# Allegro board pcb.brd
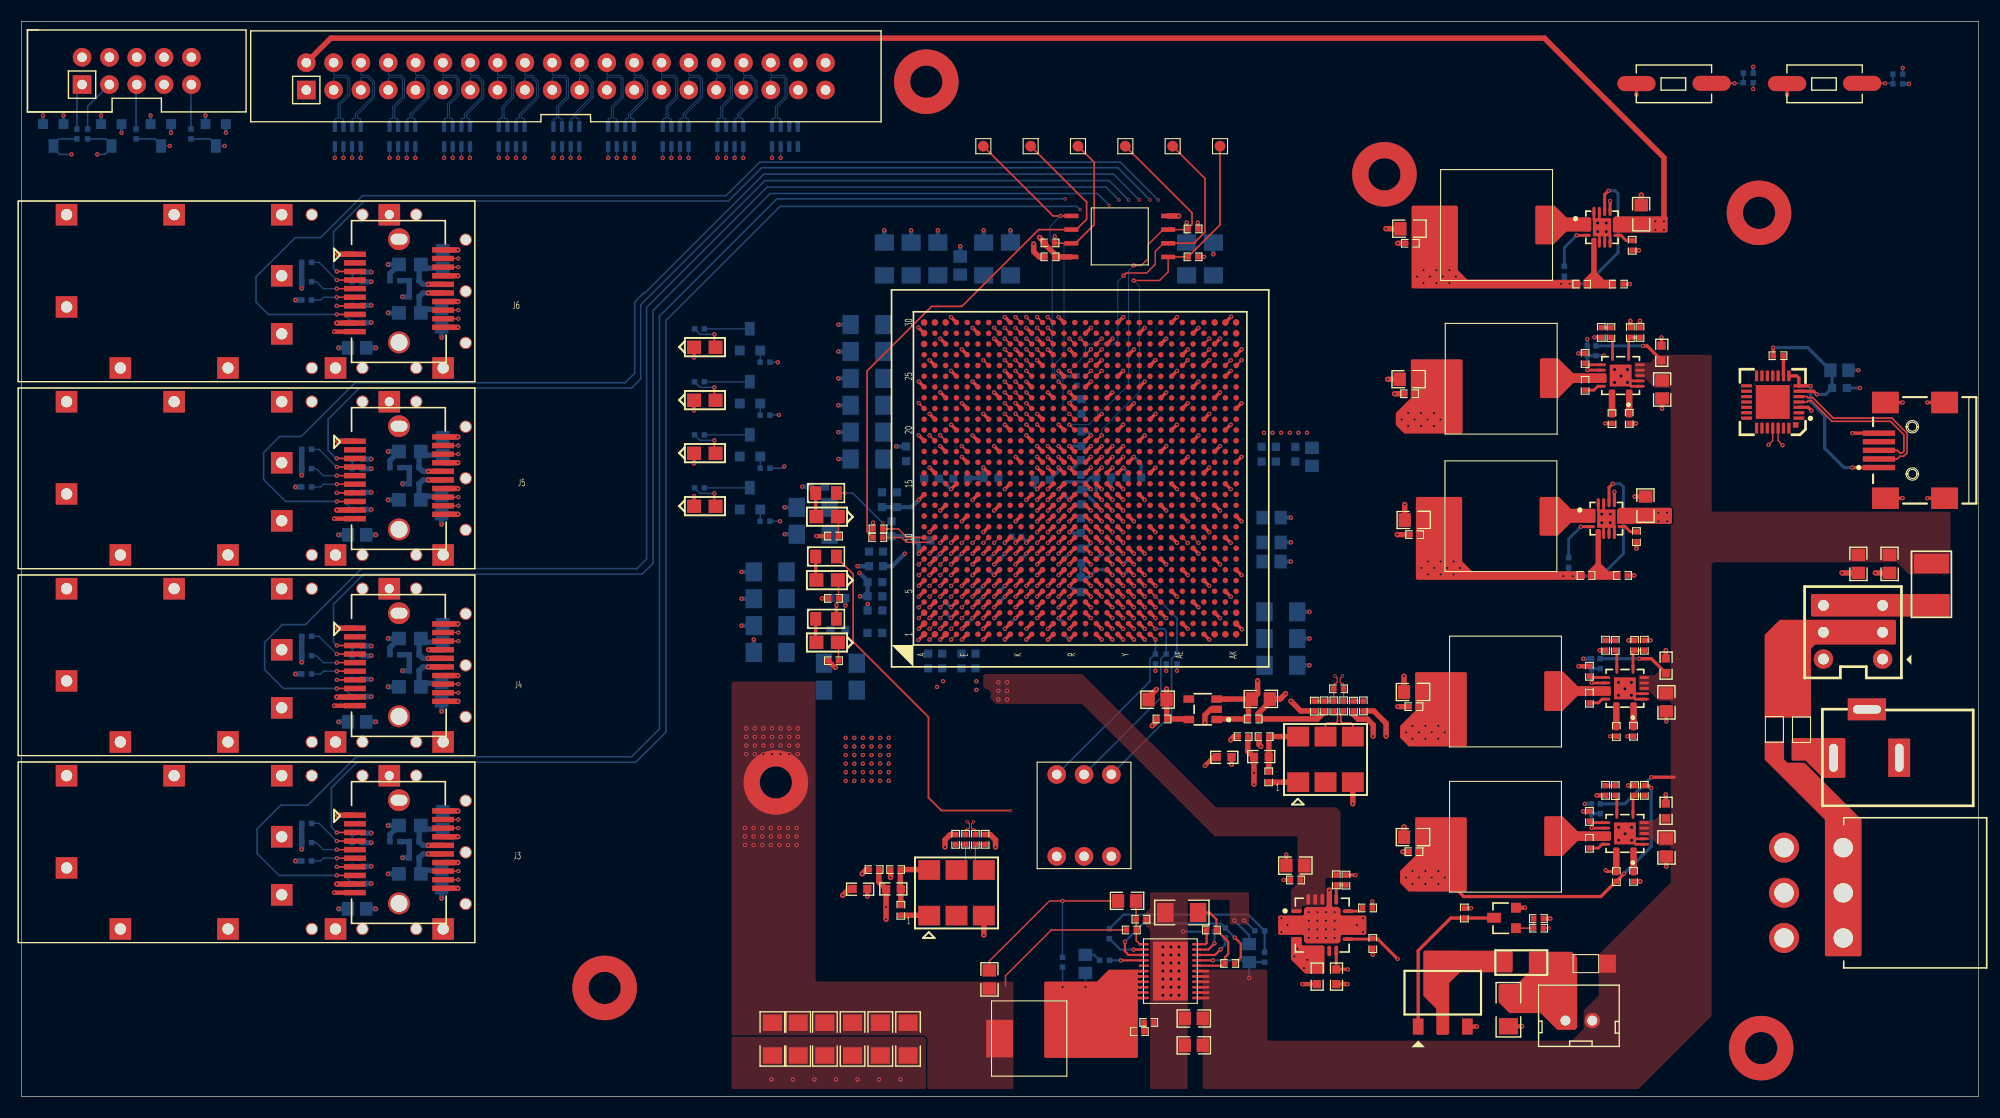
[diagram p0: board, top side]
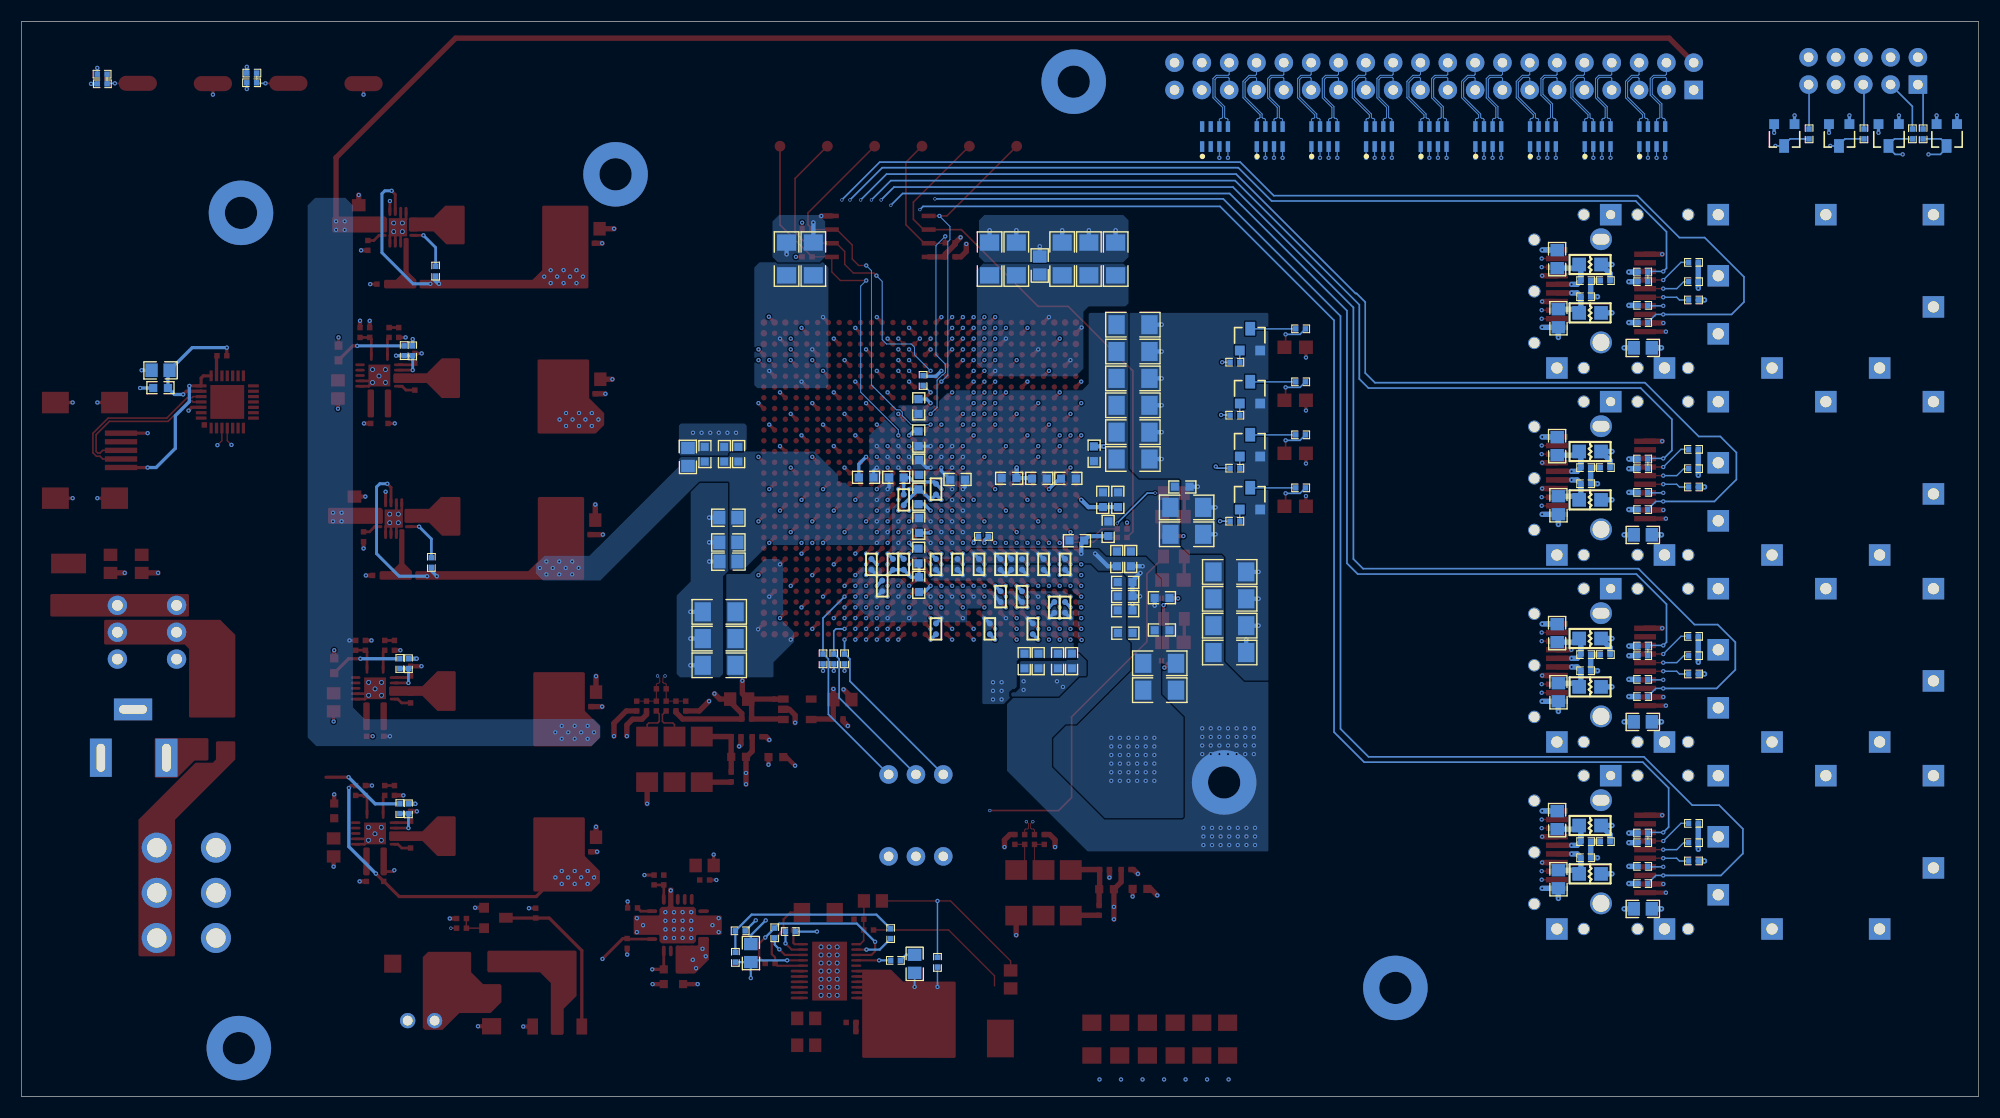
[diagram p1: board, bottom side, seen from below]

Outline 181.9 x 100 mm; copper layers: TOP, GND1, SIG2, 3V3, GND2, BOTTOM. Coordinates in mm from the lower left corner of the outline.
Outline path: 0,100 181.9,100 181.9,0 0,0 0,100

## Design rules (mm)
constraint set DEFAULT: min track width 0.089, pair gap 0.2
net group DP_GPIO1: nets GPIO1_N GPIO1_P
net group DP_GPIO2: nets GPIO2_N GPIO2_P
net group DP_GPIO3: nets GPIO3_N GPIO3_P
net group DP_GPIO4: nets GPIO4_N GPIO4_P
net group DP_GPIO5: nets GPIO5_N GPIO5_P
net group DP_GPIO6: nets GPIO6_N GPIO6_P
net group DP_GPIO7: nets GPIO7_N GPIO7_P
net group DP_GPIO8: nets GPIO8_N GPIO8_P
net group DP_GPIO9: nets GPIO9_N GPIO9_P
net group DP_GPIO10: nets GPIO10_N GPIO10_P
net group DP_GPIO11: nets GPIO11_N GPIO11_P
net group DP_GPIO12: nets GPIO12_N GPIO12_P
net group DP_GPIO13: nets GPIO13_N GPIO13_P
net group DP_GPIO14: nets GPIO14_N GPIO14_P
net group DP_GPIO15: nets GPIO15_N GPIO15_P
net group DP_GPIO16: nets GPIO16_N GPIO16_P
net group DP_GPIO17: nets GPIO17_N GPIO17_P
net group DP_GPIO_H_1: nets GPIO_H_1N GPIO_H_1P
net group DP_GPIO_H_2: nets GPIO_H_2N GPIO_H_2P
net group DP_GPIO_H_3: nets GPIO_H_3N GPIO_H_3P
net group DP_GPIO_H_4: nets GPIO_H_4N GPIO_H_4P
net group DP_GPIO_H_5: nets GPIO_H_5N GPIO_H_5P
net group DP_GPIO_H_6: nets GPIO_H_6N GPIO_H_6P
net group DP_GPIO_H_7: nets GPIO_H_7N GPIO_H_7P
net group DP_GPIO_H_8: nets GPIO_H_8N GPIO_H_8P
net group DP_GPIO_H_9: nets GPIO_H_9N GPIO_H_9P
net group DP_GPIO_H_10: nets GPIO_H_10N GPIO_H_10P
net group DP_GPIO_H_11: nets GPIO_H_11N GPIO_H_11P
net group DP_GPIO_H_12: nets GPIO_H_12N GPIO_H_12P
net group DP_GPIO_H_13: nets GPIO_H_13N GPIO_H_13P
net group DP_GPIO_H_14: nets GPIO_H_14N GPIO_H_14P
net group DP_GPIO_H_15: nets GPIO_H_15N GPIO_H_15P
net group DP_GPIO_H_16: nets GPIO_H_16N GPIO_H_16P
net group DP_GPIO_H_17: nets GPIO_H_17N GPIO_H_17P
net group DP_GTX_CLK_SRC: nets GTX_CLK_N0 GTX_CLK_P0
net group DP_GTXCLK0_115: nets GTXCLK_N_115 GTXCLK_P_115
net group DP_SYS_CLK: nets CLK_N CLK_P
net group DP_SYS_CLK_2_CAP: nets N492322 N492394
net group DP_USB2UART_IN: nets N720129 N720133
net group MG_SFP1_RX: nets SFP1_RX_N SFP1_RX_P
net group MG_SFP1_TX: nets SFP1_TX_N SFP1_TX_P
net group MG_SFP2_RX: nets SFP2_RX_N SFP2_RX_P
net group MG_SFP2_TX: nets SFP2_TX_N SFP2_TX_P
net group MG_SFP3_RX: nets SFP3_RX_N SFP3_RX_P
net group MG_SFP3_TX: nets SFP3_TX_N SFP3_TX_P
net group MG_SFP4_RX: nets SFP4_RX_N SFP4_RX_P
net group MG_SFP4_TX: nets SFP4_TX_N SFP4_TX_P

## Placement (name value [footprint] x y rotation side)
C1  10uF  [C0805]  170.73 49.55 270 top
C2  100nF  [C0805]  173.63 49.55 270 top
C3  100uF  [C1206]  138.21 8.06 270 top
C4  4.7uF_12V  [C0805]  114.11 13.34 270 bottom
C5  100nF  [C0805]  98.89 12.34 270 bottom
C6  1nF  [C0402]  103.89 6.04 180 top
C7  6.8nF  [C0805]  89.96 10.89 270 top
C8  1nF  [C0805]  102.76 18.19 0 top
C9  15uF_12V  [C0805]  108.96 4.77 180 top
C10  15uF_12V  [C0805]  108.96 7.27 180 top
C11  100uF  [C1206]  72.19 5.34 270 top
C12  100uF  [C1206]  79.82 5.34 270 top
C13  100uF  [C1206]  69.79 5.34 270 top
C14  22uF  [C0805]  129.41 53.62 0 top
C15  100nF  [C0402]  129.51 52.27 0 top
C16  100uF  [C1206]  74.67 5.34 270 top
C17  100uF  [C1206]  77.25 5.34 270 top
C18  100uF  [C1206]  82.41 5.34 270 top
C19  10uF  [C0805]  150.96 54.97 90 top
C20  3.3nF  [C0402]  150.11 52.07 270 top
C21  330nF  [C1206]  107.84 17.12 180 top
C22  100nF  [C0402]  145.74 37.07 90 top
C23  100nF  [C0402]  145.34 66.17 90 top
C24  10uF_12V  [C0805]  152.89 36.67 270 top
C25  4.7uF_12V  [C0603]  152.84 40.07 90 top
C26  47uF  [C0805]  129.34 37.62 0 top
C27  100nF  [C0402]  129.44 36.27 0 top
C28  10uF_12V  [C0805]  152.49 65.77 270 top
C29  4.7uF_12V  [C0603]  152.44 69.17 90 top
C30  47uF  [C0805]  128.94 66.72 0 top
C31  100nF  [C0402]  129.04 65.37 0 top
C32  10nF  [C0402]  145.74 39.57 90 top
C33  8.2nF  [C0402]  147.24 41.97 270 top
C34  8.2nF  [C0402]  146.84 71.07 270 top
C35  10nF  [C0402]  145.34 68.67 90 top
C36  100nF  [C0402]  145.74 23.57 90 top
C37  22uF  [C0805]  129.01 80.72 0 top
C38  100nF  [C0402]  129.11 79.37 0 top
C39  10uF_12V  [C0805]  152.89 23.17 270 top
C40  4.7uF_12V  [C0603]  152.84 26.57 90 top
C41  47uF  [C0805]  129.34 24.12 0 top
C42  100nF  [C0402]  129.44 22.77 0 top
C43  10uF  [C0805]  150.56 82.07 90 top
C44  3.3nF  [C0402]  149.71 79.17 270 top
C45  10nF  [C0402]  145.74 26.07 90 top
C46  8.2nF  [C0402]  147.24 28.47 270 top
C49  10uF  [C0805]  115.2 36.97 0 top
C50  100nF  [C0402]  114.5 35.12 0 top
C51  10uF  [C0805]  105.6 36.92 180 top
C52  100nF  [C0402]  106 35.12 180 top
C60  2.2uF  [C0603]  120.4 11.14 90 top
C61  100nF  [C0402]  118.4 20.14 180 top
C62  22uF  [C0805]  118.4 21.49 180 top
C63  2.2uF  [C0603]  122.2 11.14 90 top
C64  1nF  [C0402]  125.1 17.54 180 top
C69  100uF  [C1206]  80.2 77.91 90 bottom
C70  100uF  [C1206]  85.17 77.91 90 bottom
C71  100uF  [C1206]  117.06 45.08 0 bottom
C72  100uF  [C1206]  117.06 42.6 0 bottom
C73  100uF  [C1206]  110.79 77.91 90 bottom
C74  100uF  [C1206]  117.06 40.11 0 bottom
C75  100uF  [C1206]  108.3 77.91 90 bottom
C76  100uF  [C1206]  82.69 77.91 90 bottom
C77  100uF  [C1206]  76.11 37.8 0 bottom
C78  100uF  [C1206]  73.59 54.8 180 bottom
C79  100uF  [C1206]  69.59 43.8 180 bottom
C80  4.7uF  [C0603]  103.39 57.57 0 bottom
C81  4.7uF  [C0603]  94.89 57.37 0 bottom
C82  4.7uF  [C0603]  98.47 53.11 270 bottom
C83  4.7uF  [C0603]  80.07 50.01 270 bottom
C84  4.7uF  [C0603]  78.77 50.01 270 bottom
C85  4.7uF  [C0603]  74.01 56.73 180 bottom
C86  4.7uF  [C0603]  75.89 46.37 0 bottom
C87  4.7uF  [C0603]  87.29 57.47 0 bottom
C88  4.7uF  [C0603]  90.11 57.53 180 bottom
C89  4.7uF  [C0603]  98.53 50.29 90 bottom
C90  1uF  [C0603]  98.47 47.61 270 bottom
C91  470nF  [CC0402]  99.9 49.5 90 bottom
C92  22nF  [CC0402]  100.9 49.5 90 bottom
C93  100uF  [C1206]  78.59 59.3 180 bottom
C94  100uF  [C1206]  78.59 61.8 180 bottom
C95  100uF  [C1206]  78.59 64.3 180 bottom
C96  100uF  [C1206]  78.59 66.8 180 bottom
C97  100uF  [C1206]  69.59 46.3 180 bottom
C98  100uF  [C1206]  69.59 48.8 180 bottom
C99  100uF  [C1206]  73.59 52.3 180 bottom
C100  100uF  [C1206]  78.59 71.8 180 bottom
C101  100uF  [C1206]  78.59 69.3 180 bottom
C102  100uF  [C1206]  76.11 40.3 0 bottom
C103  100uF  [C1206]  69.59 41.3 180 bottom
C104  4.7uF  [C0603]  75.89 43.37 0 bottom
C105  4.7uF  [C0603]  84.59 57.47 0 bottom
C106  4.7uF  [C0603]  82.23 59.79 90 bottom
C107  4.7uF  [C0603]  81.37 55.51 270 bottom
C108  4.7uF  [C0603]  79.97 55.51 270 bottom
C109  4.7uF  [C0603]  80.87 52.81 270 bottom
C110  4.7uF  [C0603]  83.81 51.73 180 bottom
C111  4.7uF  [C0603]  98.53 64.19 90 bottom
C112  4.7uF  [C0603]  98.53 61.19 90 bottom
C113  4.7uF  [C0603]  98.47 58.51 270 bottom
C114  4.7uF  [C0603]  79.31 43.13 180 bottom
C115  4.7uF  [C0603]  79.33 45.21 180 bottom
C116  1uF  [C0603]  79.33 46.53 180 bottom
C117  1uF  [C0603]  79.33 47.85 180 bottom
C118  470nF  [CC0402]  86.9 49.5 90 bottom
C119  470nF  [CC0402]  89.9 49.5 90 bottom
C120  470nF  [CC0402]  90.9 49.5 90 bottom
C121  470nF  [CC0402]  96.9 49.5 90 bottom
C122  22nF  [CC0402]  84.9 49.5 90 bottom
C123  22nF  [CC0402]  88.9 49.5 90 bottom
C124  22nF  [CC0402]  92.9 49.5 90 bottom
C125  22nF  [CC0402]  94.9 49.5 90 bottom
C126  4.7uF  [C0603]  88.67 40.51 270 bottom
C127  4.7uF  [C0603]  87.37 40.51 270 bottom
C128  1uF  [C0603]  84.27 40.51 270 bottom
C129  1uF  [C0603]  85.57 40.51 270 bottom
C130  470nF  [CC0402]  87.9 43.5 270 bottom
C131  470nF  [CC0402]  88.9 46.5 90 bottom
C132  470nF  [CC0402]  90.9 46.5 90 bottom
C133  470nF  [CC0402]  101.9 47.5 90 bottom
C134  22nF  [CC0402]  84.9 45.5 90 bottom
C135  22nF  [CC0402]  85.9 45.5 90 bottom
C136  22nF  [CC0402]  91.9 43.5 270 bottom
C137  22nF  [CC0402]  96.9 43.5 270 bottom
C138  47uF  [C0805]  116.2 51.55 0 bottom
C139  47uF  [C0805]  116.2 53.85 0 bottom
C140  47uF  [C0805]  116.19 49.77 0 bottom
C141  4.7uF  [C0603]  115.27 59.75 90 bottom
C142  47uF  [C0805]  119.95 59.5 90 bottom
C143  4.7uF  [C0603]  116.59 59.75 90 bottom
C144  100nF  [CC0402]  96.9 56.5 270 bottom
C145  470nF  [CC0402]  99.9 55.5 270 bottom
C146  100nF  [C0402]  95.58 78.11 180 top
C147  47uF  [C0805]  87.25 77.3 90 bottom
C148  100uF  [C1206]  89.43 77.91 90 bottom
C149  100nF  [C0402]  115.48 33.47 180 top
C150  100nF  [C0402]  113.53 33.47 180 top
C151  4.7uF  [C0603]  111.78 31.57 0 top
C152  100nF  [C0402]  121.98 36.32 270 top
C153  100nF  [C0402]  122.89 36.32 270 top
C154  100uF  [C1206]  91.92 77.91 90 bottom
C155  1uF  [C0603]  168.98 65.91 0 bottom
C156  10uF  [C0805]  168.98 67.56 0 bottom
C157  22uF  [C0805]  31.2 17.46 0 bottom
C158  100nF  [C0402]  34.7 23.71 0 bottom
C159  10uF  [C0805]  39.05 20.21 270 bottom
C160  100nF  [C0402]  36.5 22.21 180 bottom
C161  10uF  [C0805]  39.15 25.71 90 bottom
C162  100nF  [C0402]  36.5 23.71 180 bottom
C163  100nF  [C0402]  81.23 21.11 180 top
C164  100nF  [C0402]  79.23 21.11 180 top
C165  4.7uF  [C0603]  77.93 19.31 0 top
C166  22uF  [C0805]  31.2 34.85 0 bottom
C167  100nF  [C0402]  34.7 41.1 0 bottom
C168  10uF  [C0805]  39.05 37.6 270 bottom
C169  100nF  [C0402]  36.5 39.6 180 bottom
C170  10uF  [C0805]  39.15 43.1 90 bottom
C171  100nF  [C0402]  36.5 41.1 180 bottom
C172  100nF  [C0402]  87.74 23.91 270 top
C173  100nF  [C0402]  88.66 23.91 270 top
C174  4.7uF  [C0603]  118.4 59.75 90 bottom
C175  22uF  [C0805]  31.2 52.25 0 bottom
C176  100nF  [C0402]  34.7 58.5 0 bottom
C177  10uF  [C0805]  39.05 55 270 bottom
C178  100nF  [C0402]  36.5 57 180 bottom
C179  10uF  [C0805]  39.15 60.5 90 bottom
C180  100nF  [C0402]  36.5 58.5 180 bottom
C181  22uF  [C0805]  31.2 69.64 0 bottom
C182  100nF  [C0402]  34.7 75.9 0 bottom
C183  10uF  [C0805]  39.05 72.4 270 bottom
C184  100nF  [C0402]  36.5 74.4 180 bottom
C185  10uF  [C0805]  39.15 77.9 90 bottom
C186  100nF  [C0402]  36.5 75.9 180 bottom
CCLK  TESTPOINT  [TESTPOINT_M1]  93.8 88.4 0 top
CS  TESTPOINT  [TESTPOINT_M1]  111.4 88.4 0 top
D0  TESTPOINT  [TESTPOINT_M1]  89.4 88.4 0 top
D1  TESTPOINT  [TESTPOINT_M1]  107 88.4 0 top
D2  TESTPOINT  [TESTPOINT_M1]  102.6 88.4 0 top
D3  TESTPOINT  [TESTPOINT_M1]  98.2 88.4 0 top
D4  BAT54S  [SOT-23]  2 90.45 0 bottom
D5  BAT54S  [SOT-23]  12 90.45 0 bottom
D6  BAT54S  [SOT-23]  7.4 90.45 0 bottom
D7  BAT54S  [SOT-23]  17.1 90.45 0 bottom
D8  LED  [LED_0805]  74.88 53.95 90 top
D9  LED  [LED_0805]  74.88 48.05 90 top
D10  LED  [LED_0805]  74.88 42.25 90 top
D11  LED  [LED_0805]  63.51 69.7 270 top
D12  LED  [LED_0805]  63.51 54.9 270 top
D13  LED  [LED_0805]  63.51 59.83 270 top
D14  LED  [LED_0805]  63.51 64.77 270 top
F1  -  [FUSE_1812]  177.53 47.65 90 top
G1  OSC_7050  [OSC6-5X7]  118.67 29.24 0 top
G2  OSC_7050  [OSC6-5X7]  84.37 16.83 0 top
J1  HEADER 20x2/M  [IDC-40J]  50.6 94.9 0 top
J2  USB_B_3  [MINIUSBB]  172.65 60.11 180 top
J3  SFP & CONN  [SFP_SHIELD]  30.99 26.16 0 top
J4  SFP & CONN  [SFP_SHIELD]  30.99 43.56 0 top
J5  SFP & CONN  [SFP_SHIELD]  30.99 60.95 0 top
J6  SFP & CONN  [SFP_SHIELD]  30.99 78.35 0 top
J8  B340A  [B340]  165.45 34.12 90 top
J9  B340A  [B340]  162.93 34.15 90 top
J11  B340A  [B340]  145.41 12.36 0 top
L1  PA0512_101NLT_105nH_250uOhm  [PA0512]  93.66 5.39 180 top
L2  2.2uH 5A  [WRH105R]  137.51 53.97 180 top
L3  2.2uH 5A  [WRH105R]  137.94 37.67 180 top
L4  2.2uH 5A  [WRH105R]  137.54 66.77 180 top
L5  2.2uH 5A  [WRH105R]  137.11 81.07 180 top
L6  2.2uH 5A  [WRH105R]  137.94 24.17 180 top
L7  120Ohm@100Mhz  [L0603]  100.59 57.57 0 bottom
L8  120Ohm@100Mhz  [L0603]  98.53 55.79 90 bottom
L9  120R@100Mhz  [L0603]  115.25 31.6 180 top
L10  220Ohm@100Mhz  [L0805]  36.1 25.21 0 bottom
L11  220Ohm@100Mhz  [L0805]  36.1 20.71 0 bottom
L12  120R@100Mhz  [L0603]  81.05 19.29 180 top
L13  220Ohm@100Mhz  [L0805]  36.1 42.6 0 bottom
L14  220Ohm@100Mhz  [L0805]  36.1 38.1 0 bottom
L15  220Ohm@100Mhz  [L0805]  36.1 60 0 bottom
L16  220Ohm@100Mhz  [L0805]  36.1 55.5 0 bottom
L17  220Ohm@100Mhz  [L0805]  36.1 77.4 0 bottom
L18  220Ohm@100Mhz  [L0805]  36.1 72.9 0 bottom
Q1  NDT3055L  [SOT-223]  132.11 9.66 0 top
Q2  MMBT3904L  [SOT-23]  138.91 15.66 90 top
Q3  MMBT3904L  [SOT-23]  68.66 69.39 180 bottom
Q4  MMBT3904L  [SOT-23]  68.66 54.6 180 bottom
Q5  MMBT3904L  [SOT-23]  68.66 59.53 180 bottom
Q6  MMBT3904L  [SOT-23]  68.66 64.46 180 bottom
R1  10R  [R1206]  139.41 12.46 0 top
R2  1K  [R0402]  134.11 17.06 270 top
R3  1K  [R0402]  141.01 15.66 180 top
R4  10K  [R0402]  141.01 16.56 0 top
R5  2R  [R0402]  100.66 12.67 180 bottom
R6  3.01R  [R0402]  104.79 6.89 0 top
R7  205K  [R0402]  115.55 12.96 90 bottom
R8  6.65K  [R0402]  103.16 15.49 0 top
R9  68.1K  [R0402]  96.76 12.49 90 bottom
R10  105K  [R0402]  112.31 12.38 0 top
R11  39.2K  [R0402]  111.89 15.22 270 bottom
R12  1K  [R0402]  101.11 15.14 270 bottom
R13  10K  [R0402]  143.81 49.67 270 bottom
R14  124K  [R0402]  110.61 15.49 0 top
R15  18.7K 1%  [R0402]  145.41 48.47 180 top
R16  105K  [R0402]  115.09 15.41 180 bottom
R17  187K  [R0402]  110.44 15.34 180 bottom
R18  10K  [R0402]  104.06 16.49 0 top
R19  15K 1%  [R0402]  148.81 48.47 180 top
R20  10K  [R0402]  148.24 33.97 90 top
R21  10K  [R0402]  147.84 63.07 90 top
R22  35.7K 1%  [R0402]  146.74 40.27 270 bottom
R23  NC  [R0402]  146.34 69.37 270 bottom
R24  56K 1%  [R0402]  150.84 41.97 270 top
R25  31.6K 1%  [R0402]  150.44 71.07 270 top
R26  8.06K 1%  [R0402]  145.94 40.27 90 bottom
R27  NC  [R0402]  145.54 69.37 90 bottom
R28  10K 1%  [R0402]  149.94 41.97 90 top
R29  1.69K  [R0402]  147.74 71.07 90 top
R30  10K 1%  [R0402]  149.54 71.07 90 top
R31  1.69K  [R0402]  148.14 41.97 90 top
R32  80.6K  [R0402]  149.84 33.97 270 top
R33  80.6K  [R0402]  149.44 63.07 270 top
R34  10K  [R0402]  148.24 20.47 90 top
R35  NC  [R0402]  146.74 26.77 270 bottom
R36  130K 1%  [R0402]  150.84 28.47 270 top
R37  10K  [R0402]  143.41 76.77 270 bottom
R38  10K 1%  [R0402]  145.01 75.57 180 top
R39  NC  [R0402]  145.94 26.77 90 bottom
R40  150K 1%  [R0402]  149.94 28.47 90 top
R41  1.69K  [R0402]  148.14 28.47 90 top
R42  4.7K 1%  [R0402]  148.41 75.57 180 top
R43  80.6K  [R0402]  149.84 20.47 270 top
R47  NC  [R0402]  125.6 14.24 90 top
R48  2.49K 1%  [R0402]  122.2 20.14 270 top
R49  4.99K 1%  [R0402]  123.1 20.14 90 top
R50  4.7K  [R0402]  108.88 78.11 180 top
R51  4.7K  [R0402]  108.88 80.71 180 top
R52  33R  [R0402]  79.6 52 0 top
R53  1K  [R0402]  107.4 40.7 270 bottom
R54  4.7K  [R0402]  92.5 52.1 0 bottom
R55  4.7K  [R0402]  79.6 52.8 180 top
R56  4.7K  [R0402]  95.58 79.41 180 top
R59  33R  [R0402]  5.15 89.54 270 bottom
R60  33R  [R0402]  10.65 89.54 270 bottom
R61  33R  [R0402]  6.15 89.54 270 bottom
R62  33R  [R0402]  15.75 89.54 270 bottom
R63  330R  [R0402]  75.48 52.13 0 top
R64  330R  [R0402]  75.48 46.33 0 top
R65  330R  [R0402]  75.48 40.53 0 top
R66  220R  [R0805]  74.78 50.23 0 top
R67  220R  [R0805]  74.78 44.43 0 top
R68  220R  [R0805]  74.78 56.13 0 top
R69  1K 1%  [R0402]  120.16 36.32 90 top
R70  1K 1%  [R0402]  123.81 36.32 90 top
R71  1K  [R0402]  98.1 66.6 270 bottom
R72  100K  [R0402]  122.43 37.92 0 top
R73  1K 1%  [R0402]  121.07 36.32 270 top
R74  1K 1%  [R0402]  124.72 36.32 270 top
R75  4.7K  [R0402]  115.93 29.72 270 top
R76  330R  [R0402]  63.01 71.41 0 bottom
R77  330R  [R0402]  63.01 56.62 0 bottom
R78  1K  [R0402]  69.11 68.31 180 bottom
R79  1K  [R0402]  69.11 53.52 180 bottom
R80  330R  [R0402]  63.01 61.55 0 bottom
R81  330R  [R0402]  63.01 66.48 0 bottom
R82  1K  [R0402]  69.11 58.45 180 bottom
R83  1K  [R0402]  69.11 63.38 180 bottom
R84  10K  [R0402]  174.4 94.2 0 bottom
R85  1K  [R0402]  174.4 95.1 180 bottom
R86  10K  [R0402]  160.5 95.2 0 bottom
R87  1K  [R0402]  160.5 94.3 180 bottom
R88  10K  [R0402]  163.28 68.91 0 top
R89  4.7K  [R0402]  31.2 19.81 180 bottom
R90  4.7K  [R0402]  31.2 24.51 180 bottom
R91  4.7K  [R0402]  26.5 25.41 0 bottom
R92  4.7K  [R0402]  26.5 23.61 0 bottom
R93  4.7K  [R0402]  26.5 21.91 0 bottom
R94  NC  [R0402]  31.2 23.61 180 bottom
R95  4.7K  [R0402]  31.2 21.41 180 bottom
R96  100R %1  [CC0402]  102.9 49.5 270 bottom
R97  4.7K  [R0402]  31.2 37.2 180 bottom
R98  4.7K  [R0402]  31.2 41.9 180 bottom
R99  4.7K  [R0402]  26.5 42.8 0 bottom
R100  4.7K  [R0402]  26.5 41 0 bottom
R101  4.7K  [R0402]  26.5 39.3 0 bottom
R102  NC  [R0402]  31.2 41 180 bottom
R103  4.7K  [R0402]  81.73 17.31 270 top
R104  4.7K  [R0402]  31.2 38.8 180 bottom
R105  240R 1%  [R0402]  86.83 23.91 270 top
R106  240R 1%  [R0402]  89.57 23.91 270 top
R107  4.7K  [R0402]  31.2 54.6 180 bottom
R108  4.7K  [R0402]  31.2 59.3 180 bottom
R109  4.7K  [R0402]  26.5 60.2 0 bottom
R110  4.7K  [R0402]  26.5 58.4 0 bottom
R111  4.7K  [R0402]  26.5 56.7 0 bottom
R112  NC  [R0402]  31.2 58.4 180 bottom
R113  4.7K  [R0402]  31.2 56.2 180 bottom
R114  4.7K  [R0402]  31.2 72 180 bottom
R115  4.7K  [R0402]  31.2 76.7 180 bottom
R116  4.7K  [R0402]  26.5 77.6 0 bottom
R117  4.7K  [R0402]  26.5 75.8 0 bottom
R118  4.7K  [R0402]  26.5 74.1 0 bottom
R119  NC  [R0402]  31.2 75.8 180 bottom
R120  4.7K  [R0402]  31.2 73.6 180 bottom
R121  1K  [R0402]  106.4 40.7 270 bottom
R122  1K  [R0402]  105.4 40.7 270 bottom
RN1  33R  [RN-8P]  31.52 88.37 90 bottom
RN2  33R  [RN-8P]  36.6 88.37 90 bottom
RN3  33R  [RN-8P]  41.68 88.37 90 bottom
RN4  33R  [RN-8P]  46.76 88.37 90 bottom
RN5  33R  [RN-8P]  51.84 88.37 90 bottom
RN6  33R  [RN-8P]  56.92 88.37 90 bottom
RN7  33R  [RN-8P]  62 88.37 90 bottom
RN8  33R  [RN-8P]  67.08 88.37 90 bottom
RN9  33R  [RN-8P]  72.16 88.37 90 bottom
SW1  POWER SWITCH  [POWER_SW]  167.49 43.19 180 top
SW2  Button  [KEY735SO]  171.09 94.25 180 top
SW3  Button  [KEY735SO]  157.09 94.25 180 top
T1  AJ243  [CN1-DCJACK]  174.53 31.51 90 top
U1  39-30-1060_2  [CON_MOL_5569_6P]  169.33 23.15 0 top
U2  FAN_SOCKET  [CON2_2_54P]  146.01 7.06 180 top
U3  TPS53355  [LSON_CLIP22]  106.79 11.67 0 top
U4  TLV62130RGT_5  [TLV62130RGT]  147.31 53.76 270 top
U5  TPS54620  [VQFN_3_5]  149.04 37.97 0 top
U6  TPS54620  [VQFN_3_5]  148.64 67.07 0 top
U7  TLV62130RGT_5  [TLV62130RGT]  146.91 80.86 270 top
U8  TPS54620  [VQFN_3_5]  149.04 24.47 0 top
U10  SPX3819M5-1-8  [SOT-23-5]  109.8 36.02 90 top
U11  TPS74401_QFN20  [QFN20]  120.9 15.94 270 top
U13  XC7K325TFFG900  [FFG900]  98.4 57.5 90 top
U14  W25Q128  [SOP2_8]  102.08 80.01 180 top
U15  JTAG  [JTAG-10]  5.63 94.13 0 top
U16  CP2102  [QFN-28]  162.78 64.61 180 top
U18  -  [SW_DIP_3]  98.76 26.15 270 top

## Library data of the parts
C1 C2 = CAP_NP: room: POWER_IN
C3 = CAP_NP: room: FAN
C4-C13 C16-C18 C21 = CAP_NP: room: 1.0V
C14 C15 C19 C20 = CAP_NP: room: 1.8V
C22 C24-C27 C32 C33 = CAP_NP: room: 5V
C23 C28-C31 C34 C35 = CAP_NP: room: 3.3V
C36 C39-C42 C45 C46 = CAP_NP: room: 1.5V
C37 C38 C43 C44 = CAP_NP: room: VADJ
C49-C52 = CAP_NP: room: MGTVCCAUX_1.8V
C60-C64 = CAP_NP: room: MGTAVTT_1.2V
C69-C76 C147 C148 C154 = CAP_NP: room: FPGA_IO_POWER_PURIFIER
C77-C88 C93-C113 = CAP_NP: room: FPGA_1V0_PURIFIER
C89-C92 = CAP_NP: room: FPGA_GTX_AUX_PURIFIER
C114-C125 = CAP_NP: room: FPGA_GTX_1V0_PURIFIER
C126-C137 = CAP_NP: room: FPGA_1V2_PURIFIER
C138-C143 C174 = CAP_NP: room: FPGA_1V8_PURIFIER
C144 C145 = CAP_NP: room: FPGA_CONFIG
C146 = CAP_NP: room: QSPI_FLASH
C149-C153 = CAP_NP: room: SYS_CLK
C155 C156 = CAP_NP: room: UART
C157-C162 = CAP_NP: room: SFP1
C163-C165 C172 C173 = CAP_NP: room: GTX_BANK115_DEVICE
C166-C171 = CAP_NP: room: SFP2
C175-C180 = CAP_NP: room: SFP3
C181-C186 = CAP_NP: room: SFP4
CCLK CS D0-D3 = TESTPOINT
D4-D7 = BAT54S: room: JTAG
D8-D10 = LED: room: FPGA_CONFIG
D11-D14 = LED
F1 = FUSE: room: POWER_IN
G1 = OSC_7050_NC: room: SYS_CLK
G2 = OSC_7050_NC: room: GTX_BANK115_DEVICE
J1 = HEADER 20x2/M: room: GPIO
J2 = USB_B_3: room: UART
J3 = SFP_CON: room: SFP1
J4 = SFP_CON: room: SFP2
J5 = SFP_CON: room: SFP3
J6 = SFP_CON: room: SFP4
J8 J9 = BZX84C33/SOT: room: POWER_IN
J11 = BZX84C33/SOT: room: FAN
L1 = INDUCTOR: room: 1.0V
L2 = INDUCTOR: room: 1.8V
L3 = INDUCTOR: room: 5V
L4 = INDUCTOR: room: 3.3V
L5 = INDUCTOR: room: VADJ
L6 = INDUCTOR: room: 1.5V
L7 L8 = INDUCTOR: room: FPGA_CONFIG
L9 = INDUCTOR: room: SYS_CLK
L10 L11 = INDUCTOR: room: SFP1
L12 = INDUCTOR: room: GTX_BANK115_DEVICE
L13 L14 = INDUCTOR: room: SFP2
L15 L16 = INDUCTOR: room: SFP3
L17 L18 = INDUCTOR: room: SFP4
Q1 = NDT3055L: room: FAN
Q2 = MMBT3904L: room: FAN
Q3-Q6 = MMBT3904L: room: LED
R1-R4 = R: room: FAN
R5-R12 R14 R16-R18 = R: room: 1.0V
R13 R15 R19 = R: room: 1.8V
R20 R22 R24 R26 R28 R31 R32 = R: room: 5V
R21 R23 R25 R27 R29 R30 R33 = R: room: 3.3V
R34-R36 R39-R41 R43 = R: room: 1.5V
R37 R38 R42 = R: room: VADJ
R47-R49 = R: room: MGTAVTT_1.2V
R50 R51 R56 = R: room: QSPI_FLASH
R52-R55 R63-R68 R71 R121 R122 = R: room: FPGA_CONFIG
R59-R62 = R: room: JTAG
R69 R70 R72-R75 = R: room: SYS_CLK
R76-R83 = R: room: LED
R84-R87 = R: room: BUTTON
R88 = R: room: UART
R89-R95 = R: room: SFP1
R96 R103 R105 R106 = R: room: GTX_BANK115_DEVICE
R97-R102 R104 = R: room: SFP2
R107-R113 = R: room: SFP3
R114-R120 = R: room: SFP4
RN1-RN9 = RESARR_IS_4/SM: room: GPIO
SW1 = SENS59150-SPST: room: POWER_IN
SW2 SW3 = Button: room: BUTTON
T1 = AJ243: room: POWER_IN
U1 = 39-30-1060_2: room: POWER_IN
U2 = FAN_SOCKET: room: FAN
U3 = TPS53355: room: 1.0V
U4 = TLV62130RGT_5: room: 1.8V
U5 = TPS54620: room: 5V
U6 = TPS54620: room: 3.3V
U7 = TLV62130RGT_5: room: VADJ
U8 = TPS54620: room: 1.5V
U10 = SPX3819M5-2-5: room: MGTVCCAUX_1.8V
U11 = TPS74401_QFN20: room: MGTAVTT_1.2V
U13 = XC7K325TFFG900: room: FPGA
U14 = W25Q128: room: QSPI_FLASH
U15 = JTAG
U16 = CP2102: room: UART
U18 = SW_DIP_3

## Footprints (pads in the part's own frame, mm; a bottom-side part is the same pattern mirrored in y, then rotated)
B340
  rect 1.6x1.68 smd: 1(-1.99,0) 2(1.99,0)
C0402
  rect 0.508x0.508 smd: 1(-0.457,0) 2(0.457,0)
C0603
  rect 0.762x0.762 smd: 1(-0.686,0) 2(0.686,0)
C0805
  rect 1.143x1.27 smd: 1(-0.838,0) 2(0.838,0)
C1206
  rect 1.524x1.778 smd: 1(-1.524,0) 2(1.524,0)
CC0402
  round 0.559 smd: 1(-0.5,0) 2(0.5,0)
CN1-DCJACK
  rect 3.556x2.032 hole 2.6x0.8: 1(0,0) 3(0,6.1)
  rect 2.032x3.556 hole 0.8x2.6: 2(4.5,2.997)
CON2_2_54P
  round 1.422 hole 0.914: 1(0,0) 2(2.5,0)
CON_MOL_5569_6P
  round 2.794 hole 1.803: 1(0,0) 2(0,-4.2) 3(0,-8.4) 4(-5.5,0) 5(-5.5,-4.2) 6(-5.5,-8.4)
FFG900
  round 0.61 smd: A1(-14.5,14.5) A2(-13.5,14.5) A3(-12.5,14.5) A28(12.5,14.5) A29(13.5,14.5) A30(14.5,14.5) AH1(-14.5,-12.5) AH30(14.5,-12.5) AJ1(-14.5,-13.5) AJ30(14.5,-13.5) AK1(-14.5,-14.5) AK2(-13.5,-14.5) AK3(-12.5,-14.5) AK28(12.5,-14.5) AK29(13.5,-14.5) AK30(14.5,-14.5) B1(-14.5,13.5) B30(14.5,13.5) C1(-14.5,12.5) C30(14.5,12.5)
  round 0.508 smd: A4(-11.5,14.5) A5(-10.5,14.5) A6(-9.5,14.5) A7(-8.5,14.5) A8(-7.5,14.5) A9(-6.5,14.5) A10(-5.5,14.5) A11(-4.5,14.5) A12(-3.5,14.5) A13(-2.5,14.5) A14(-1.5,14.5) A15(-0.5,14.5) A16(0.5,14.5) A17(1.5,14.5) A18(2.5,14.5) A19(3.5,14.5) A20(4.5,14.5) A21(5.5,14.5) A22(6.5,14.5) A23(7.5,14.5) A24(8.5,14.5) A25(9.5,14.5) A26(10.5,14.5) A27(11.5,14.5) AA1(-14.5,-5.5) AA2(-13.5,-5.5) AA3(-12.5,-5.5) AA4(-11.5,-5.5) AA5(-10.5,-5.5) AA6(-9.5,-5.5) AA7(-8.5,-5.5) AA8(-7.5,-5.5) AA9(-6.5,-5.5) AA10(-5.5,-5.5) AA11(-4.5,-5.5) AA12(-3.5,-5.5) AA13(-2.5,-5.5) AA14(-1.5,-5.5) AA15(-0.5,-5.5) AA16(0.5,-5.5) AA17(1.5,-5.5) AA18(2.5,-5.5) AA19(3.5,-5.5) AA20(4.5,-5.5) AA21(5.5,-5.5) AA22(6.5,-5.5) AA23(7.5,-5.5) AA24(8.5,-5.5) AA25(9.5,-5.5) AA26(10.5,-5.5) AA27(11.5,-5.5) AA28(12.5,-5.5) AA29(13.5,-5.5) AA30(14.5,-5.5) AB1(-14.5,-6.5) AB2(-13.5,-6.5) AB3(-12.5,-6.5) AB4(-11.5,-6.5) AB5(-10.5,-6.5) AB6(-9.5,-6.5) AB7(-8.5,-6.5) AB8(-7.5,-6.5) AB9(-6.5,-6.5) AB10(-5.5,-6.5) AB11(-4.5,-6.5) AB12(-3.5,-6.5) AB13(-2.5,-6.5) AB14(-1.5,-6.5) AB15(-0.5,-6.5) AB16(0.5,-6.5) AB17(1.5,-6.5) AB18(2.5,-6.5) AB19(3.5,-6.5) AB20(4.5,-6.5) AB21(5.5,-6.5) AB22(6.5,-6.5) AB23(7.5,-6.5) AB24(8.5,-6.5) AB25(9.5,-6.5) AB26(10.5,-6.5) AB27(11.5,-6.5) AB28(12.5,-6.5) AB29(13.5,-6.5) AB30(14.5,-6.5) AC1(-14.5,-7.5) AC2(-13.5,-7.5) AC3(-12.5,-7.5) AC4(-11.5,-7.5) AC5(-10.5,-7.5) AC6(-9.5,-7.5) AC7(-8.5,-7.5) AC8(-7.5,-7.5) AC9(-6.5,-7.5) AC10(-5.5,-7.5) AC11(-4.5,-7.5) AC12(-3.5,-7.5) AC13(-2.5,-7.5) AC14(-1.5,-7.5) AC15(-0.5,-7.5) AC16(0.5,-7.5) AC17(1.5,-7.5) AC18(2.5,-7.5) AC19(3.5,-7.5) AC20(4.5,-7.5) AC21(5.5,-7.5) AC22(6.5,-7.5) AC23(7.5,-7.5) AC24(8.5,-7.5) AC25(9.5,-7.5) AC26(10.5,-7.5) AC27(11.5,-7.5) AC28(12.5,-7.5) AC29(13.5,-7.5) AC30(14.5,-7.5) AD1(-14.5,-8.5) AD2(-13.5,-8.5) AD3(-12.5,-8.5) AD4(-11.5,-8.5) AD5(-10.5,-8.5) AD6(-9.5,-8.5) AD7(-8.5,-8.5) AD8(-7.5,-8.5) AD9(-6.5,-8.5) AD10(-5.5,-8.5) AD11(-4.5,-8.5) AD12(-3.5,-8.5) AD13(-2.5,-8.5) AD14(-1.5,-8.5) AD15(-0.5,-8.5) AD16(0.5,-8.5) AD17(1.5,-8.5) AD18(2.5,-8.5) AD19(3.5,-8.5) AD20(4.5,-8.5) AD21(5.5,-8.5) AD22(6.5,-8.5) AD23(7.5,-8.5) AD24(8.5,-8.5) AD25(9.5,-8.5) AD26(10.5,-8.5) AD27(11.5,-8.5) AD28(12.5,-8.5) AD29(13.5,-8.5) AD30(14.5,-8.5) AE1(-14.5,-9.5) AE2(-13.5,-9.5) AE3(-12.5,-9.5) AE4(-11.5,-9.5) AE5(-10.5,-9.5) AE6(-9.5,-9.5) AE7(-8.5,-9.5) AE8(-7.5,-9.5) AE9(-6.5,-9.5) AE10(-5.5,-9.5) AE11(-4.5,-9.5) AE12(-3.5,-9.5) AE13(-2.5,-9.5) AE14(-1.5,-9.5) AE15(-0.5,-9.5) AE16(0.5,-9.5) AE17(1.5,-9.5) AE18(2.5,-9.5) AE19(3.5,-9.5) AE20(4.5,-9.5) AE21(5.5,-9.5) AE22(6.5,-9.5) AE23(7.5,-9.5) AE24(8.5,-9.5) AE25(9.5,-9.5) AE26(10.5,-9.5) AE27(11.5,-9.5) AE28(12.5,-9.5) AE29(13.5,-9.5) AE30(14.5,-9.5) AF1(-14.5,-10.5) AF2(-13.5,-10.5) AF3(-12.5,-10.5) AF4(-11.5,-10.5) AF5(-10.5,-10.5) AF6(-9.5,-10.5) AF7(-8.5,-10.5) AF8(-7.5,-10.5) AF9(-6.5,-10.5) AF10(-5.5,-10.5) AF11(-4.5,-10.5) AF12(-3.5,-10.5) AF13(-2.5,-10.5) AF14(-1.5,-10.5) AF15(-0.5,-10.5) AF16(0.5,-10.5) AF17(1.5,-10.5) AF18(2.5,-10.5) AF19(3.5,-10.5) AF20(4.5,-10.5) AF21(5.5,-10.5) AF22(6.5,-10.5) AF23(7.5,-10.5) AF24(8.5,-10.5) AF25(9.5,-10.5) AF26(10.5,-10.5) AF27(11.5,-10.5) AF28(12.5,-10.5) AF29(13.5,-10.5) AF30(14.5,-10.5) AG1(-14.5,-11.5) AG2(-13.5,-11.5) AG3(-12.5,-11.5) AG4(-11.5,-11.5) AG5(-10.5,-11.5) AG6(-9.5,-11.5) AG7(-8.5,-11.5) AG8(-7.5,-11.5) AG9(-6.5,-11.5) AG10(-5.5,-11.5) AG11(-4.5,-11.5) AG12(-3.5,-11.5) AG13(-2.5,-11.5) AG14(-1.5,-11.5) AG15(-0.5,-11.5) AG16(0.5,-11.5) AG17(1.5,-11.5) AG18(2.5,-11.5) AG19(3.5,-11.5) AG20(4.5,-11.5) AG21(5.5,-11.5) AG22(6.5,-11.5) AG23(7.5,-11.5) AG24(8.5,-11.5) AG25(9.5,-11.5) AG26(10.5,-11.5) AG27(11.5,-11.5) AG28(12.5,-11.5) AG29(13.5,-11.5) AG30(14.5,-11.5) AH2(-13.5,-12.5) AH3(-12.5,-12.5) AH4(-11.5,-12.5) AH5(-10.5,-12.5) AH6(-9.5,-12.5) AH7(-8.5,-12.5) AH8(-7.5,-12.5) AH9(-6.5,-12.5) AH10(-5.5,-12.5) AH11(-4.5,-12.5) AH12(-3.5,-12.5) AH13(-2.5,-12.5) AH14(-1.5,-12.5) AH15(-0.5,-12.5) AH16(0.5,-12.5) AH17(1.5,-12.5) AH18(2.5,-12.5) AH19(3.5,-12.5) AH20(4.5,-12.5) AH21(5.5,-12.5) AH22(6.5,-12.5) AH23(7.5,-12.5) AH24(8.5,-12.5) AH25(9.5,-12.5) AH26(10.5,-12.5) AH27(11.5,-12.5) AH28(12.5,-12.5) AH29(13.5,-12.5) AJ2(-13.5,-13.5) AJ3(-12.5,-13.5) AJ4(-11.5,-13.5) AJ5(-10.5,-13.5) AJ6(-9.5,-13.5) AJ7(-8.5,-13.5) AJ8(-7.5,-13.5) AJ9(-6.5,-13.5) AJ10(-5.5,-13.5) AJ11(-4.5,-13.5) AJ12(-3.5,-13.5) AJ13(-2.5,-13.5) AJ14(-1.5,-13.5) AJ15(-0.5,-13.5) AJ16(0.5,-13.5) AJ17(1.5,-13.5) AJ18(2.5,-13.5) AJ19(3.5,-13.5) AJ20(4.5,-13.5) AJ21(5.5,-13.5) AJ22(6.5,-13.5) AJ23(7.5,-13.5) AJ24(8.5,-13.5) AJ25(9.5,-13.5) AJ26(10.5,-13.5) AJ27(11.5,-13.5) AJ28(12.5,-13.5) AJ29(13.5,-13.5) AK4(-11.5,-14.5) AK5(-10.5,-14.5) AK6(-9.5,-14.5) AK7(-8.5,-14.5) AK8(-7.5,-14.5) AK9(-6.5,-14.5) AK10(-5.5,-14.5) AK11(-4.5,-14.5) AK12(-3.5,-14.5) AK13(-2.5,-14.5) AK14(-1.5,-14.5) AK15(-0.5,-14.5) AK16(0.5,-14.5) AK17(1.5,-14.5) AK18(2.5,-14.5) AK19(3.5,-14.5) AK20(4.5,-14.5) AK21(5.5,-14.5) AK22(6.5,-14.5) AK23(7.5,-14.5) AK24(8.5,-14.5) AK25(9.5,-14.5) AK26(10.5,-14.5) AK27(11.5,-14.5) B2(-13.5,13.5) B3(-12.5,13.5) B4(-11.5,13.5) B5(-10.5,13.5) B6(-9.5,13.5) B7(-8.5,13.5) B8(-7.5,13.5) B9(-6.5,13.5) B10(-5.5,13.5) B11(-4.5,13.5) B12(-3.5,13.5) B13(-2.5,13.5) B14(-1.5,13.5) B15(-0.5,13.5) B16(0.5,13.5) B17(1.5,13.5) B18(2.5,13.5) B19(3.5,13.5) B20(4.5,13.5) B21(5.5,13.5) B22(6.5,13.5) B23(7.5,13.5) B24(8.5,13.5) B25(9.5,13.5) B26(10.5,13.5) B27(11.5,13.5) B28(12.5,13.5) B29(13.5,13.5) C2(-13.5,12.5) C3(-12.5,12.5) C4(-11.5,12.5) C5(-10.5,12.5) C6(-9.5,12.5) C7(-8.5,12.5) C8(-7.5,12.5) C9(-6.5,12.5) C10(-5.5,12.5) C11(-4.5,12.5) C12(-3.5,12.5) C13(-2.5,12.5) C14(-1.5,12.5) C15(-0.5,12.5) C16(0.5,12.5) C17(1.5,12.5) C18(2.5,12.5) C19(3.5,12.5) C20(4.5,12.5) C21(5.5,12.5) C22(6.5,12.5) C23(7.5,12.5) C24(8.5,12.5) C25(9.5,12.5) C26(10.5,12.5) C27(11.5,12.5) C28(12.5,12.5) C29(13.5,12.5) D1(-14.5,11.5) D2(-13.5,11.5) D3(-12.5,11.5) D4(-11.5,11.5) D5(-10.5,11.5) D6(-9.5,11.5) D7(-8.5,11.5) D8(-7.5,11.5) D9(-6.5,11.5) D10(-5.5,11.5) D11(-4.5,11.5) D12(-3.5,11.5) D13(-2.5,11.5) D14(-1.5,11.5) D15(-0.5,11.5) D16(0.5,11.5) D17(1.5,11.5) D18(2.5,11.5) D19(3.5,11.5) D20(4.5,11.5) D21(5.5,11.5) D22(6.5,11.5) D23(7.5,11.5) D24(8.5,11.5) D25(9.5,11.5) D26(10.5,11.5) D27(11.5,11.5) D28(12.5,11.5) D29(13.5,11.5) D30(14.5,11.5) E1(-14.5,10.5) E2(-13.5,10.5) E3(-12.5,10.5) E4(-11.5,10.5) E5(-10.5,10.5) E6(-9.5,10.5) E7(-8.5,10.5) E8(-7.5,10.5) E9(-6.5,10.5) E10(-5.5,10.5) E11(-4.5,10.5) E12(-3.5,10.5) E13(-2.5,10.5) E14(-1.5,10.5) E15(-0.5,10.5) E16(0.5,10.5) E17(1.5,10.5) E18(2.5,10.5) E19(3.5,10.5) E20(4.5,10.5) E21(5.5,10.5) E22(6.5,10.5) E23(7.5,10.5) E24(8.5,10.5) E25(9.5,10.5) E26(10.5,10.5) E27(11.5,10.5) E28(12.5,10.5) E29(13.5,10.5) E30(14.5,10.5) F1(-14.5,9.5) F2(-13.5,9.5) F3(-12.5,9.5) F4(-11.5,9.5) F5(-10.5,9.5) F6(-9.5,9.5) F7(-8.5,9.5) F8(-7.5,9.5) F9(-6.5,9.5) F10(-5.5,9.5) F11(-4.5,9.5) F12(-3.5,9.5) F13(-2.5,9.5) F14(-1.5,9.5) F15(-0.5,9.5) F16(0.5,9.5) F17(1.5,9.5) F18(2.5,9.5) F19(3.5,9.5) F20(4.5,9.5) F21(5.5,9.5) F22(6.5,9.5) F23(7.5,9.5) F24(8.5,9.5) F25(9.5,9.5) F26(10.5,9.5) F27(11.5,9.5) F28(12.5,9.5) F29(13.5,9.5) F30(14.5,9.5) G1(-14.5,8.5) G2(-13.5,8.5) G3(-12.5,8.5) G4(-11.5,8.5) G5(-10.5,8.5) G6(-9.5,8.5) G7(-8.5,8.5) G8(-7.5,8.5) G9(-6.5,8.5) G10(-5.5,8.5) G11(-4.5,8.5) G12(-3.5,8.5) G13(-2.5,8.5) G14(-1.5,8.5) G15(-0.5,8.5) G16(0.5,8.5) G17(1.5,8.5) G18(2.5,8.5) G19(3.5,8.5) G20(4.5,8.5) G21(5.5,8.5) G22(6.5,8.5) G23(7.5,8.5) G24(8.5,8.5) G25(9.5,8.5) G26(10.5,8.5) G27(11.5,8.5) G28(12.5,8.5) G29(13.5,8.5) G30(14.5,8.5) H1(-14.5,7.5) H2(-13.5,7.5) H3(-12.5,7.5) H4(-11.5,7.5) H5(-10.5,7.5) H6(-9.5,7.5) H7(-8.5,7.5) H8(-7.5,7.5) H9(-6.5,7.5) H10(-5.5,7.5) H11(-4.5,7.5) H12(-3.5,7.5) H13(-2.5,7.5) H14(-1.5,7.5) H15(-0.5,7.5) H16(0.5,7.5) H17(1.5,7.5) H18(2.5,7.5) H19(3.5,7.5) H20(4.5,7.5) H21(5.5,7.5) H22(6.5,7.5) H23(7.5,7.5) H24(8.5,7.5) H25(9.5,7.5) H26(10.5,7.5) H27(11.5,7.5) H28(12.5,7.5) H29(13.5,7.5) H30(14.5,7.5) J1(-14.5,6.5) J2(-13.5,6.5) J3(-12.5,6.5) J4(-11.5,6.5) J5(-10.5,6.5) J6(-9.5,6.5) J7(-8.5,6.5) J8(-7.5,6.5) J9(-6.5,6.5) J10(-5.5,6.5) J11(-4.5,6.5) J12(-3.5,6.5) J13(-2.5,6.5) J14(-1.5,6.5) J15(-0.5,6.5) J16(0.5,6.5) J17(1.5,6.5) J18(2.5,6.5) J19(3.5,6.5) J20(4.5,6.5) J21(5.5,6.5) J22(6.5,6.5) J23(7.5,6.5) J24(8.5,6.5) J25(9.5,6.5) J26(10.5,6.5) J27(11.5,6.5) J28(12.5,6.5) J29(13.5,6.5) J30(14.5,6.5) K1(-14.5,5.5) K2(-13.5,5.5) K3(-12.5,5.5) K4(-11.5,5.5) K5(-10.5,5.5) K6(-9.5,5.5) K7(-8.5,5.5) K8(-7.5,5.5) K9(-6.5,5.5) K10(-5.5,5.5) K11(-4.5,5.5) K12(-3.5,5.5) K13(-2.5,5.5) K14(-1.5,5.5) K15(-0.5,5.5) K16(0.5,5.5) K17(1.5,5.5) K18(2.5,5.5) K19(3.5,5.5) K20(4.5,5.5) K21(5.5,5.5) K22(6.5,5.5) K23(7.5,5.5) K24(8.5,5.5) K25(9.5,5.5) K26(10.5,5.5) K27(11.5,5.5) K28(12.5,5.5) K29(13.5,5.5) K30(14.5,5.5) L1(-14.5,4.5) L2(-13.5,4.5) L3(-12.5,4.5) L4(-11.5,4.5) L5(-10.5,4.5) L6(-9.5,4.5) L7(-8.5,4.5) L8(-7.5,4.5) L9(-6.5,4.5) L10(-5.5,4.5) L11(-4.5,4.5) L12(-3.5,4.5) L13(-2.5,4.5) L14(-1.5,4.5) L15(-0.5,4.5) L16(0.5,4.5) L17(1.5,4.5) L18(2.5,4.5) L19(3.5,4.5) L20(4.5,4.5) L21(5.5,4.5) L22(6.5,4.5) L23(7.5,4.5) L24(8.5,4.5) L25(9.5,4.5) L26(10.5,4.5) L27(11.5,4.5) L28(12.5,4.5) L29(13.5,4.5) L30(14.5,4.5) M1(-14.5,3.5) M2(-13.5,3.5) M3(-12.5,3.5) M4(-11.5,3.5) M5(-10.5,3.5) M6(-9.5,3.5) M7(-8.5,3.5) M8(-7.5,3.5) M9(-6.5,3.5) M10(-5.5,3.5) M11(-4.5,3.5) M12(-3.5,3.5) M13(-2.5,3.5) M14(-1.5,3.5) M15(-0.5,3.5) M16(0.5,3.5) M17(1.5,3.5) M18(2.5,3.5) M19(3.5,3.5) M20(4.5,3.5) M21(5.5,3.5) M22(6.5,3.5) M23(7.5,3.5) M24(8.5,3.5) M25(9.5,3.5) M26(10.5,3.5) M27(11.5,3.5) M28(12.5,3.5) M29(13.5,3.5) M30(14.5,3.5) N1(-14.5,2.5) N2(-13.5,2.5) N3(-12.5,2.5) N4(-11.5,2.5) N5(-10.5,2.5) N6(-9.5,2.5) N7(-8.5,2.5) N8(-7.5,2.5) N9(-6.5,2.5) N10(-5.5,2.5) N11(-4.5,2.5) N12(-3.5,2.5) N13(-2.5,2.5) N14(-1.5,2.5) N15(-0.5,2.5) N16(0.5,2.5) N17(1.5,2.5) N18(2.5,2.5) N19(3.5,2.5) N20(4.5,2.5) N21(5.5,2.5) N22(6.5,2.5) N23(7.5,2.5) N24(8.5,2.5) N25(9.5,2.5) N26(10.5,2.5) N27(11.5,2.5) N28(12.5,2.5) N29(13.5,2.5) N30(14.5,2.5) P1(-14.5,1.5) P2(-13.5,1.5) P3(-12.5,1.5) P4(-11.5,1.5) P5(-10.5,1.5) P6(-9.5,1.5) P7(-8.5,1.5) P8(-7.5,1.5) P9(-6.5,1.5) P10(-5.5,1.5) P11(-4.5,1.5) P12(-3.5,1.5) P13(-2.5,1.5) P14(-1.5,1.5) P15(-0.5,1.5) P16(0.5,1.5) P17(1.5,1.5) P18(2.5,1.5) P19(3.5,1.5) P20(4.5,1.5) P21(5.5,1.5) P22(6.5,1.5) P23(7.5,1.5) P24(8.5,1.5) P25(9.5,1.5) P26(10.5,1.5) P27(11.5,1.5) P28(12.5,1.5) P29(13.5,1.5) P30(14.5,1.5) R1(-14.5,0.5) R2(-13.5,0.5) R3(-12.5,0.5) R4(-11.5,0.5) R5(-10.5,0.5) R6(-9.5,0.5) R7(-8.5,0.5) R8(-7.5,0.5) R9(-6.5,0.5) R10(-5.5,0.5) R11(-4.5,0.5) R12(-3.5,0.5) R13(-2.5,0.5) R14(-1.5,0.5) R15(-0.5,0.5) R16(0.5,0.5) R17(1.5,0.5) R18(2.5,0.5) R19(3.5,0.5) R20(4.5,0.5) R21(5.5,0.5) R22(6.5,0.5) R23(7.5,0.5) R24(8.5,0.5) R25(9.5,0.5) R26(10.5,0.5) R27(11.5,0.5) R28(12.5,0.5) R29(13.5,0.5) R30(14.5,0.5) T1(-14.5,-0.5) T2(-13.5,-0.5) T3(-12.5,-0.5) T4(-11.5,-0.5) T5(-10.5,-0.5) T6(-9.5,-0.5) T7(-8.5,-0.5) T8(-7.5,-0.5) T9(-6.5,-0.5) T10(-5.5,-0.5) T11(-4.5,-0.5) T12(-3.5,-0.5) T13(-2.5,-0.5) T14(-1.5,-0.5) T15(-0.5,-0.5) T16(0.5,-0.5) T17(1.5,-0.5) T18(2.5,-0.5) T19(3.5,-0.5) T20(4.5,-0.5) T21(5.5,-0.5) T22(6.5,-0.5) T23(7.5,-0.5) T24(8.5,-0.5) T25(9.5,-0.5) T26(10.5,-0.5) T27(11.5,-0.5) T28(12.5,-0.5) T29(13.5,-0.5) T30(14.5,-0.5) U1(-14.5,-1.5) U2(-13.5,-1.5) U3(-12.5,-1.5) U4(-11.5,-1.5) U5(-10.5,-1.5) U6(-9.5,-1.5) U7(-8.5,-1.5) U8(-7.5,-1.5) U9(-6.5,-1.5) U10(-5.5,-1.5) U11(-4.5,-1.5) U12(-3.5,-1.5) U13(-2.5,-1.5) U14(-1.5,-1.5) U15(-0.5,-1.5) U16(0.5,-1.5) U17(1.5,-1.5) U18(2.5,-1.5) U19(3.5,-1.5) U20(4.5,-1.5) U21(5.5,-1.5) U22(6.5,-1.5) U23(7.5,-1.5) U24(8.5,-1.5) U25(9.5,-1.5) U26(10.5,-1.5) U27(11.5,-1.5) U28(12.5,-1.5) U29(13.5,-1.5) U30(14.5,-1.5) V1(-14.5,-2.5) V2(-13.5,-2.5) V3(-12.5,-2.5) V4(-11.5,-2.5) V5(-10.5,-2.5) V6(-9.5,-2.5) V7(-8.5,-2.5) V8(-7.5,-2.5) V9(-6.5,-2.5) V10(-5.5,-2.5) V11(-4.5,-2.5) V12(-3.5,-2.5) V13(-2.5,-2.5) V14(-1.5,-2.5) V15(-0.5,-2.5) V16(0.5,-2.5) V17(1.5,-2.5) V18(2.5,-2.5) V19(3.5,-2.5) V20(4.5,-2.5) V21(5.5,-2.5) V22(6.5,-2.5) V23(7.5,-2.5) V24(8.5,-2.5) V25(9.5,-2.5) V26(10.5,-2.5) V27(11.5,-2.5) V28(12.5,-2.5) V29(13.5,-2.5) V30(14.5,-2.5) W1(-14.5,-3.5) W2(-13.5,-3.5) W3(-12.5,-3.5) W4(-11.5,-3.5) W5(-10.5,-3.5) W6(-9.5,-3.5) W7(-8.5,-3.5) W8(-7.5,-3.5) W9(-6.5,-3.5) W10(-5.5,-3.5) W11(-4.5,-3.5) W12(-3.5,-3.5) W13(-2.5,-3.5) W14(-1.5,-3.5) W15(-0.5,-3.5) W16(0.5,-3.5) W17(1.5,-3.5) W18(2.5,-3.5) W19(3.5,-3.5) W20(4.5,-3.5) W21(5.5,-3.5) W22(6.5,-3.5) W23(7.5,-3.5) W24(8.5,-3.5) W25(9.5,-3.5) W26(10.5,-3.5) W27(11.5,-3.5) W28(12.5,-3.5) W29(13.5,-3.5) W30(14.5,-3.5) Y1(-14.5,-4.5) Y2(-13.5,-4.5) Y3(-12.5,-4.5) Y4(-11.5,-4.5) Y5(-10.5,-4.5) Y6(-9.5,-4.5) Y7(-8.5,-4.5) Y8(-7.5,-4.5) Y9(-6.5,-4.5) Y10(-5.5,-4.5) Y11(-4.5,-4.5) Y12(-3.5,-4.5) Y13(-2.5,-4.5) Y14(-1.5,-4.5) Y15(-0.5,-4.5) Y16(0.5,-4.5) Y17(1.5,-4.5) Y18(2.5,-4.5) Y19(3.5,-4.5) Y20(4.5,-4.5) Y21(5.5,-4.5) Y22(6.5,-4.5) Y23(7.5,-4.5) Y24(8.5,-4.5) Y25(9.5,-4.5) Y26(10.5,-4.5) Y27(11.5,-4.5) Y28(12.5,-4.5) Y29(13.5,-4.5) Y30(14.5,-4.5)
FUSE_1812
  rect 1.829x3.251 smd: 1(-1.93,0) 2(1.93,0)
IDC-40J
  rect 1.727x1.727 hole 0.889: 1(-24.13,-1.27)
  round 1.727 hole 0.889: 2(-24.13,1.27) 3(-21.59,-1.27) 4(-21.59,1.27) 5(-19.05,-1.27) 6(-19.05,1.27) 7(-16.51,-1.27) 8(-16.51,1.27) 9(-13.97,-1.27) 10(-13.97,1.27) 11(-11.43,-1.27) 12(-11.43,1.27) 13(-8.89,-1.27) 14(-8.89,1.27) 15(-6.35,-1.27) 16(-6.35,1.27) 17(-3.81,-1.27) 18(-3.81,1.27) 19(-1.27,-1.27) 20(-1.27,1.27) 21(1.27,-1.27) 22(1.27,1.27) 23(3.81,-1.27) 24(3.81,1.27) 25(6.35,-1.27) 26(6.35,1.27) 27(8.89,-1.27) 28(8.89,1.27) 29(11.43,-1.27) 30(11.43,1.27) 31(13.97,-1.27) 32(13.97,1.27) 33(16.51,-1.27) 34(16.51,1.27) 35(19.05,-1.27) 36(19.05,1.27) 37(21.59,-1.27) 38(21.59,1.27) 39(24.13,-1.27) 40(24.13,1.27)
JTAG-10
  rect 1.73x1.73 hole 0.89: 1(0,0)
  round 1.73 hole 0.89: 2(0,2.54) 3(2.54,0) 4(2.54,2.54) 5(5.08,0) 6(5.08,2.54) 7(7.62,0) 8(7.62,2.54) 9(10.16,0) 10(10.16,2.54)
KEY735SO
  oval 3.556x1.4 smd: 1(0,0) 2(6.985,0.025)
L0603
  rect 0.762x0.762 smd: 1(-0.686,0) 2(0.686,0)
L0805
  rect 1.27x1.27 smd: 1(-1.016,0) 2(1.016,0)
LED_0805
  rect 1.25x1.3 smd: 1(0,1) 2(0,-1)
LSON_CLIP22
  oval 0.95x0.23 smd: 1(-2.475,2.5) 2(-2.475,2) 3(-2.475,1.5) 4(-2.475,1) 5(-2.475,0.5) 6(-2.475,0) 7(-2.475,-0.5) 8(-2.475,-1) 9(-2.475,-1.5) 10(-2.475,-2) 11(-2.475,-2.5) 12(2.475,-2.5) 13(2.475,-2) 14(2.475,-1.5) 15(2.475,-1) 16(2.475,-0.5) 17(2.475,0) 18(2.475,0.5) 19(2.475,1) 20(2.475,1.5) 21(2.475,2) 22(2.475,2.5)
  rect 3.24x5.48 smd: 23(0,0)
MINIUSBB
  rect 3x0.5 smd: 1(0,1.6) 2(0,0.8) 3(0,0) 4(0,-0.8) 5(0,-1.6)
  rect 2.5x2 smd: 6(-0.6,-4.45) 7(-6.1,-4.45) 8(-0.6,4.45) 9(-6.1,4.45)
OSC6-5X7
  rect 2.032x1.829 smd: 1(0,0) 2(2.54,0) 3(5.08,0) 4(5.08,4.242) 5(2.54,4.242) 6(0,4.242)
PA0512
  rect 2.5x3.5 smd: 1(-2.75,0) 2(2.75,0)
POWER_SW
  round 1.8 hole 1: 1(-5.5,2.5) 2(-5.5,0) 3(-5.5,-2.5) 4(0,2.5) 5(0,0) 6(0,-2.5)
QFN20
  oval 0.35x1 smd: 1(-1.3,-2.4) 2(-0.65,-2.4) 3(0,-2.4) 4(0.65,-2.4) 5(1.3,-2.4) 11(1.3,2.4) 12(0.65,2.4) 13(0,2.4) 14(-0.65,2.4) 15(-1.3,2.4)
  oval 1x0.35 smd: 6(2.4,-1.3) 7(2.4,-0.65) 8(2.4,0) 9(2.4,0.65) 10(2.4,1.3) 16(-2.4,1.3) 17(-2.4,0.65) 18(-2.4,0) 19(-2.4,-0.65) 20(-2.4,-1.3)
  rect 3.15x3.15 smd: 21(0,0)
QFN-28
  rect 1x0.3 smd: 1(-2.43,1.5) 2(-2.43,1) 3(-2.43,0.5) 4(-2.43,0) 5(-2.43,-0.5) 6(-2.43,-1) 7(-2.43,-1.5) 15(2.43,-1.5) 16(2.43,-1) 17(2.43,-0.5) 18(2.43,0) 19(2.43,0.5) 20(2.43,1) 21(2.43,1.5)
  rect 0.3x1 smd: 8(-1.5,-2.43) 9(-1,-2.43) 10(-0.5,-2.43) 11(0,-2.43) 12(0.5,-2.43) 13(1,-2.43) 14(1.5,-2.43) 22(1.5,2.43) 23(1,2.43) 24(0.5,2.43) 25(0,2.43) 26(-0.5,2.43) 27(-1,2.43) 28(-1.5,2.43)
  rect 3.15x3.15 smd: 29(0,0)
  rect 0.508x0.508 smd: 30(-2.134,2.134)
R0402
  rect 0.508x0.508 smd: 1(-0.457,0) 2(0.457,0)
R0805
  rect 1.016x1.27 smd: 1(-0.965,0) 2(0.965,0)
R1206
  rect 1.27x1.778 smd: 1(-1.524,0) 2(1.524,0)
RN-8P
  rect 1x0.4 smd: 1(0,0) 2(0,-0.8) 3(0,-1.6) 4(0,-2.4) 5(1.858,-2.4) 6(1.858,-1.6) 7(1.858,-0.8) 8(1.858,0)
SFP_SHIELD
  rect 2x2 hole 1.05: (-26.8,3.68) (-26.8,-4.9) (-21.8,-10.58) (-16.8,3.68) (-11.8,-10.58) (-6.8,3.68) (-6.8,-2) (-6.8,-7.4) (-1.8,-10.58) (8.2,-10.58)
  round 1.15 hole 0.95: (-4,3.68) (-4,-10.58) (0.7,3.68) (0.7,-10.58) (5.7,3.68) (5.7,-10.58) (10.3,1.35) (10.3,-3.45) (10.3,-8.25)
  rect 2x2 hole 0.85: (3.2,3.68)
  round 2.032 hole 1.575x1: (4.1,1.4)
  round 2.032 hole 1.575: (4.1,-8.2)
  rect 2.032x0.508 smd: 1(0,0) 2(0,-0.8) 3(0,-1.6) 4(0,-2.4) 5(0,-3.2) 6(0,-4) 7(0,-4.8) 8(0,-5.6) 9(0,-6.4) 10(0,-7.2) 11(8.2,-6.8) 12(8.2,-6) 13(8.2,-5.2) 14(8.2,-4.4) 15(8.2,-3.6) 16(8.2,-2.8) 17(8.2,-2) 18(8.2,-1.2) 19(8.2,-0.4) 20(8.2,0.4)
SOP2_8
  rect 1.3x0.42 smd: 1(-4.5,1.905) 2(-4.5,0.635) 3(-4.5,-0.635) 4(-4.5,-1.905) 5(4.5,-1.905) 6(4.5,-0.635) 7(4.5,0.635) 8(4.5,1.905)
SOT-23
  rect 0.914x0.914 smd: 1(0,0) 2(1.9,0)
  rect 0.914x1.27 smd: 3(0.97,2.03)
SOT-23-5
  rect 0.686x0.991 smd: 1(-0.95,-1.295) 2(0,-1.295) 3(0.95,-1.295) 4(0.95,1.295) 5(-0.95,1.295)
SOT-223
  rect 0.991x1.499 smd: 1(-2.286,-3.15) 2(0,-3.15) 3(2.286,-3.15)
  rect 3.277x1.499 smd: 4(0,3.15)
SW_DIP_3
  round 1.727 hole 0.889: 1(-3.81,2.54) 2(-3.81,0) 3(-3.81,-2.54) 4(3.81,-2.54) 5(3.81,0) 6(3.81,2.54)
TESTPOINT_M1
  round 1 smd: 1(0,0)
TLV62130RGT
  oval 0.28x0.85 smd: 1(-0.75,-1.475) 2(-0.25,-1.475) 3(0.25,-1.475) 4(0.75,-1.475) 9(0.75,1.475) 10(0.25,1.475) 11(-0.25,1.475) 12(-0.75,1.475)
  oval 0.85x0.28 smd: 5(1.475,-0.75) 6(1.475,-0.25) 7(1.475,0.25) 8(1.475,0.75) 13(-1.475,0.75) 14(-1.475,0.25) 15(-1.475,-0.25) 16(-1.475,-0.75)
  rect 1.7x1.7 smd: 20(0,0)
VQFN_3_5
  oval 0.254x0.889 smd: 1(0.75,-1.8) 7(0.75,1.8) 8(-0.75,1.8) 14(-0.75,-1.8)
  oval 0.889x0.254 smd: 2(1.8,-1) 3(1.8,-0.5) 4(1.8,0) 5(1.8,0.5) 6(1.8,1) 9(-1.8,1) 10(-1.8,0.5) 11(-1.8,0) 12(-1.8,-0.5) 13(-1.8,-1)
  rect 2.032x2.032 smd: 15(0,0)
WRH105R
  rect 1.6x3.5 smd: 1(-4.5,0) 2(4.5,0)

## Nets
1.0V: C7.2 C11.1 C12.1 C13.1 C16.1 C17.1 C18.1 C77.1 C78.1 C79.1 C80.1 C81.1 C82.1 C83.1 C84.1 C85.1 C86.1 C87.1 C88.1 C93.1 C94.1 C95.1 C96.1 C97.1 C98.1 C99.1 C100.1 C101.1 C102.1 C103.1 C104.1 C105.1 C106.1 C107.1 C108.1 C109.1 C110.1 C111.1 C112.1 C113.1 C114.1 C115.1 C116.1 C117.1 C118.1 C119.1 C120.1 C121.1 C122.1 C123.1 C124.1 C125.1 L1.2 R8.1 U13.B7 U13.D7 U13.F7 U13.H7 U13.K7 U13.M7 U13.M11 U13.M13 U13.M15 U13.M17 U13.N10 U13.N12 U13.N14 U13.N16 U13.N18 U13.P7 U13.P11 U13.P17 U13.R10 U13.R12 U13.R16 U13.R18 U13.T11 U13.T17 U13.U10 U13.U12 U13.U16 U13.U18 U13.V17 U13.W16 U13.W18
1.5V: C41.2 C42.2 C60.2 L6.2 R34.1 R36.1 R47.1 R69.1 R70.1 U11.5 U11.6 U11.7 U11.8
1.8V: C14.2 C15.2 C138.1 C139.1 C140.1 C141.1 C142.1 C143.1 C174.1 L2.2 L7.2 R13.2 R15.2 U4.14(VOS) U13.C10 U13.P13 U13.T13 U13.V11 U13.V13 U13.V15 U13.W10 U13.W12 U13.W14
1V5_PG: R23.2 R27.1 R34.2 U6.10 U7.13 U8.14
1V8_PG: R13.1 R35.2 R39.1 U4.4 U8.10
3.3V: C30.2 C31.2 C49.1 C50.1 C63.2 C69.1 C70.1 C71.1 C72.1 C73.1 C74.1 C75.1 C76.1 C146.1 C147.1 C148.1 C150.1 C151.1 C154.1 C157.1 C158.1 C164.1 C165.1 C166.1 C167.1 C175.1 C176.1 C181.1 C182.1 D4.2 D5.2 D6.2 D7.2 D11.2 D12.2 D13.2 D14.2 J1.39 J1.40 L4.2 L9.2 L10.1 L11.1 L12.2 L13.1 L14.1 L15.1 L16.1 L17.1 L18.1 R2.1 R21.1 R25.1 R50.1 R51.1 R53.2 R54.2 R55.2 R56.2 R63.1 R64.1 R65.1 R84.2 R86.2 R89.1 R90.1 R91.1 R92.1 R93.1 R95.1 R97.1 R98.1 R99.1 R100.1 R101.1 R104.1 R107.1 R108.1 R109.1 R110.1 R111.1 R113.1 R114.1 R115.1 R116.1 R117.1 R118.1 R120.1 R121.2 R122.2 U10.1 U10.3 U11.10 U13.A19 U13.A29 U13.AA9 U13.AA19 U13.AA29 U13.AB6 U13.AB16 U13.AB26 U13.AC3 U13.AC13 U13.AC23 U13.AD10 U13.AD20 U13.AD30 U13.AE7 U13.AE17 U13.AE27 U13.AF4 U13.AF14 U13.AF24 U13.AG1 U13.AG11 U13.AG21 U13.AH8 U13.AH18 U13.AH28 U13.AJ5 U13.AJ15 U13.AJ25 U13.AK2 U13.AK12 U13.AK22 U13.B16 U13.B26 U13.C13 U13.C23 U13.D10 U13.D20 U13.D30 U13.E17 U13.E27 U13.F14 U13.F24 U13.G11 U13.G21 U13.H18 U13.H28 U13.J15 U13.J25 U13.K12 U13.K22 U13.L10 U13.L19 U13.L29 U13.M26 U13.N23 U13.P20 U13.P30 U13.R27 U13.T9 U13.T24 U13.U21 U13.V28 U13.W25 U13.Y12 U13.Y22 U14.8 U15.4 U15.6(VREF)
5V: C19.1 C26.2 C27.2 C43.1 J1.2 L3.2 R20.1 R24.1 U4.10 U4.11 U4.12 U7.10 U7.11 U7.12
5V0_PG: R20.2 U5.14
12V: C1.1 C2.1 C4.2 C9.1 C10.1 C24.1 C25.1 C28.1 C29.1 C39.1 C40.1 F1.2 J11.2(CATHODE) R7.1 R22.1 R23.1 R35.1 U2.1 U3.12 U3.13 U3.14 U3.15 U3.16 U3.17 U3.19 U5.4 U5.5 U5.6 U6.4 U6.5 U6.6 U8.4 U8.5 U8.6
AGND: C144.2 C145.2 L8.2 U13.P14 U13.R14 U13.T15
GND: C1.2 C2.2 C3.2 C4.1 C9.2 C10.2 C11.2 C12.2 C13.2 C14.1 C15.1 C16.2 C17.2 C18.2 C19.2 C20.2 C21.2 C24.2 C25.2 C26.1 C27.1 C28.2 C29.2 C30.1 C31.1 C32.2 C33.2 C34.2 C35.2 C37.1 C38.1 C39.2 C40.2 C41.1 C42.1 C43.2 C44.2 C45.2 C46.2 C49.2 C50.2 C51.2 C52.2 C60.1 C61.2 C62.2 C63.1 C64.1 C69.2 C70.2 C71.2 C72.2 C73.2 C74.2 C75.2 C76.2 C77.2 C78.2 C79.2 C80.2 C81.2 C82.2 C83.2 C84.2 C85.2 C86.2 C87.2 C88.2 C89.2 C90.2 C91.2 C92.2 C93.2 C94.2 C95.2 C96.2 C97.2 C98.2 C99.2 C100.2 C101.2 C102.2 C103.2 C104.2 C105.2 C106.2 C107.2 C108.2 C109.2 C110.2 C111.2 C112.2 C113.2 C114.2 C115.2 C116.2 C117.2 C118.2 C119.2 C120.2 C121.2 C122.2 C123.2 C124.2 C125.2 C126.2 C127.2 C128.2 C129.2 C130.2 C131.2 C132.2 C133.2 C134.2 C135.2 C136.2 C137.2 C138.2 C139.2 C140.2 C141.2 C142.2 C143.2 C146.2 C147.2 C148.2 C149.2 C150.2 C151.2 C154.2 C155.2 C156.2 C157.2 C158.2 C159.2 C160.2 C161.2 C162.2 C163.2 C164.2 C165.2 C166.2 C167.2 C168.2 C169.2 C170.2 C171.2 C174.2 C175.2 C176.2 C177.2 C178.2 C179.2 C180.2 C181.2 C182.2 C183.2 C184.2 C185.2 C186.2 D4.1 D5.1 D6.1 D7.1 G1.3 G2.3 J1.1 J1.37 J1.38 J2.5 J2.6 J2.7 J2.8 J2.9 J3.1 J3.9 J3.10 J3.11 J3.14 J3.17 J3.20(VEET3) J4.1 J4.9 J4.10 J4.11 J4.14 J4.17 J4.20(VEET3) J5.1 J5.9 J5.10 J5.11 J5.14 J5.17 J5.20(VEET3) J6.1 J6.9 J6.10 J6.11 J6.14 J6.17 J6.20(VEET3) L8.1 Q1.3(SOURCE) Q2.2(EMITTER) Q3.2(EMITTER) Q4.2(EMITTER) Q5.2(EMITTER) Q6.2(EMITTER) R4.2 R6.2 R16.2 R17.2 R18.2 R19.1 R26.2 R27.2 R28.2 R30.2 R32.2 R33.2 R39.2 R40.2 R42.1 R43.2 R49.2 R67.2 R71.1 R73.2 R74.2 R94.1 R102.1 R105.1 R106.1 R112.1 R119.1 SW2.2(P2) SW3.2(P2) T1.1 T1.2 U1.4 U1.5 U1.6(GND#6) U3.23 U4.6 U4.7 U4.8 U4.15 U4.16 U4.20 U5.2 U5.3 U5.15 U6.2 U6.3 U6.15 U7.6 U7.7 U7.8 U7.15 U7.16 U7.20 U8.2 U8.3 U8.15 U10.2 U11.2 U11.3 U11.4 U11.12 U11.13 U11.14 U11.17 U11.21 U13.A1 U13.A2 U13.A5 U13.A6 U13.A9 U13.A14 U13.A24 U13.AA1 U13.AA2 U13.AA3 U13.AA4 U13.AA5 U13.AA6 U13.AA7 U13.AA14 U13.AA24 U13.AB3 U13.AB4 U13.AB11 U13.AB21 U13.AC8 U13.AC18 U13.AC28 U13.AD5 U13.AD15 U13.AD25 U13.AE2 U13.AE12 U13.AE22 U13.AF9 U13.AF19 U13.AF29 U13.AG6 U13.AG16 U13.AG26 U13.AH3 U13.AH13 U13.AH23 U13.AJ10 U13.AJ20 U13.AJ30 U13.AK7 U13.AK17 U13.AK27 U13.B4 U13.B8 U13.B9 U13.B11 U13.B21 U13.C1 U13.C2 U13.C6 U13.C9 U13.C18 U13.C28 U13.D4 U13.D8 U13.D9 U13.D15 U13.D25 U13.E1 U13.E2 U13.E6 U13.E9 U13.E12 U13.E22 U13.F4 U13.F5 U13.F6 U13.F8 U13.F9 U13.F19 U13.F29 U13.G1 U13.G2 U13.G3 U13.G4 U13.G6 U13.G9 U13.G16 U13.G26 U13.H4 U13.H5 U13.H6 U13.H8 U13.H9 U13.H13 U13.H23 U13.J1 U13.J2 U13.J6 U13.J9 U13.J10 U13.J20 U13.J30 U13.K4 U13.K5 U13.K6 U13.K8 U13.K9 U13.K17 U13.K27 U13.L1 U13.L2 U13.L6 U13.L9 U13.L14 U13.L24 U13.M4 U13.M5 U13.M6 U13.M8 U13.M9 U13.M12 U13.M14 U13.M16 U13.M18 U13.M21 U13.N1 U13.N2 U13.N6 U13.N9 U13.N11 U13.N13 U13.N15 U13.N17 U13.N28 U13.P4 U13.P5 U13.P6 U13.P8 U13.P9 U13.P10 U13.P12 U13.P16 U13.P18 U13.P25 U13.R1 U13.R2 U13.R3 U13.R4 U13.R6 U13.R9 U13.R11 U13.R13 U13.R17 U13.R22 U13.T4 U13.T5 U13.T6 U13.T8 U13.T10 U13.T12 U13.T16 U13.T18 U13.T19 U13.T29 U13.U1 U13.U2 U13.U6 U13.U9 U13.U11 U13.U13 U13.U14 U13.U15 U13.U17 U13.U26 U13.V4 U13.V5 U13.V6 U13.V8 U13.V9 U13.V10 U13.V12 U13.V14 U13.V16 U13.V18 U13.V23 U13.W1 U13.W2 U13.W3 U13.W4 U13.W6 U13.W9 U13.W11 U13.W13 U13.W15 U13.W17 U13.W20 U13.W30 U13.Y3 U13.Y4 U13.Y5 U13.Y6 U13.Y7 U13.Y8 U13.Y9(GND#Y9) U13.Y17 U13.Y27 U14.4 U15.2 U15.10 U16.3 U18.4 U18.5 U18.6
CCLK: CCLK.1(TP) R52.1 U14.6
CLK_N: C153.1 R70.2 R72.2 R74.1 U13.AF10
CLK_P: C152.1 R69.2 R72.1 R73.1 U13.AE10
D0: D0.1(TP) U13.P24 U14.5
D1: D1.1(TP) U13.R25 U14.2
D2: D2.1(TP) R51.2 U13.R20 U14.3(WP)
D3: D3.1(TP) R56.1 U13.R21 U14.7
EPAD1: U16.29
EPAD2: U16.30
FAN_PWM: R3.1 U13.AE26
FCS: CS.1(TP) R50.2 U13.U19 U14.1
FPGA_DONE: R66.2 U13.M10
FPGA_INIT: R55.1 R68.2 U13.A10
FPGA_PUDC: R71.2 U13.R23
GPIO1_N: RN1.3 U13.J24
GPIO1_P: RN1.4 U13.J23
GPIO2_N: RN1.1 U13.J22
GPIO2_P: RN1.2 U13.J21
GPIO3_N: RN2.1 U13.J26
GPIO3_P: RN2.2 U13.K26
GPIO4_N: RN2.3 U13.K24
GPIO4_P: RN2.4 U13.K23
GPIO5_N: RN3.3 U13.K25
GPIO5_P: RN3.4 U13.L25
GPIO6_N: RN3.1 U13.L27
GPIO6_P: RN3.2 U13.L26
GPIO7_N: RN4.3 U13.H29
GPIO7_P: RN4.4 U13.J29
GPIO8_N: RN4.1 U13.L28
GPIO8_P: RN4.2 U13.M28
GPIO9_N: RN5.3 U13.K30
GPIO9_P: RN5.4 U13.L30
GPIO10_N: RN5.1 U13.M27
GPIO10_P: RN5.2 U13.N27
GPIO11_N: RN6.3 U13.M30
GPIO11_P: RN6.4 U13.M29
GPIO12_N: RN6.1 U13.N30
GPIO12_P: RN6.2 U13.N29
GPIO13_N: RN7.3 U13.L23
GPIO13_P: RN7.4 U13.L22
GPIO14_N: RN7.1 U13.L20
GPIO14_P: RN7.2 U13.M20
GPIO15_N: RN8.3 U13.K21
GPIO15_P: RN8.4 U13.L21
GPIO16_N: RN8.1 U13.J28
GPIO16_P: RN8.2 U13.J27
GPIO17_N: RN9.3 U13.K29
GPIO17_P: RN9.4 U13.K28
GPIO_H_1N: J1.4 RN1.6
GPIO_H_1P: J1.3 RN1.5
GPIO_H_2N: J1.6 RN1.8
GPIO_H_2P: J1.5 RN1.7
GPIO_H_3N: J1.8 RN2.6
GPIO_H_3P: J1.7 RN2.5
GPIO_H_4N: J1.10 RN2.8
GPIO_H_4P: J1.9 RN2.7
GPIO_H_5N: J1.12 RN3.6
GPIO_H_5P: J1.11 RN3.5
GPIO_H_6N: J1.14 RN3.8
GPIO_H_6P: J1.13 RN3.7
GPIO_H_7N: J1.16 RN4.6
GPIO_H_7P: J1.15 RN4.5
GPIO_H_8N: J1.18 RN4.8
GPIO_H_8P: J1.17 RN4.7
GPIO_H_9N: J1.20 RN5.6
GPIO_H_9P: J1.19 RN5.5
GPIO_H_10N: J1.22 RN5.8
GPIO_H_10P: J1.21 RN5.7
GPIO_H_11N: J1.24 RN6.6
GPIO_H_11P: J1.23 RN6.5
GPIO_H_12N: J1.26 RN6.8
GPIO_H_12P: J1.25 RN6.7
GPIO_H_13N: J1.28 RN7.6
GPIO_H_13P: J1.27 RN7.5
GPIO_H_14N: J1.30 RN7.8
GPIO_H_14P: J1.29 RN7.7
GPIO_H_15N: J1.32 RN8.6
GPIO_H_15P: J1.31 RN8.5
GPIO_H_16N: J1.34 RN8.8
GPIO_H_16P: J1.33 RN8.7
GPIO_H_17N: J1.36 RN9.6
GPIO_H_17P: J1.35 RN9.5
GTX_CLK_N0: C172.2 G2.5 R105.2
GTX_CLK_P0: C173.2 G2.4 R106.2
GTXCLK_N_115: C172.1 U13.C7
GTXCLK_P_115: C173.1 U13.C8
KEY_0: R85.1 U13.AG27
KEY_1: R87.1 U13.AG28
LED_0: R78.1 U13.A22
LED_1: R79.1 U13.C19
LED_2: R82.1 U13.B19
LED_3: R83.1 U13.E18
MGTAVTT_1.2V: C61.1 C62.1 C126.1 C127.1 C128.1 C129.1 C130.1 C131.1 C132.1 C133.1 C134.1 C135.1 C136.1 C137.1 R48.1 R96.2 U11.1 U11.18 U11.19 U11.20 U13.B3 U13.C5 U13.D3 U13.E5 U13.F3 U13.G5 U13.H3 U13.J5 U13.K3 U13.L5 U13.M3 U13.N5 U13.P3 U13.R5 U13.T3 U13.U5 U13.V3 U13.W5 U13.W7
MGTVCCAUX_1.8V: C51.1 C52.1 C89.1 C90.1 C91.1 C92.1 U10.5(VOUT) U13.T7 U13.V7
PGOOD: R10.2 R11.1 R47.2 U3.3 U4.13 U11.11
PW_GOOD: R21.2 U6.14
SFP1_DIS: J3.3 R90.2 R94.2 U13.T28
SFP1_LOSS: J3.8 R89.2 U13.R28
SFP1_RX_N: J3.13 U13.E3
SFP1_RX_P: J3.12 U13.E4
SFP1_TX_N: J3.19 U13.D1
SFP1_TX_P: J3.18 U13.D2
SFP2_DIS: J4.3 R98.2 R102.2 U13.T27
SFP2_LOSS: J4.8 R97.2 U13.T26
SFP2_RX_N: J4.13 U13.D5
SFP2_RX_P: J4.12 U13.D6
SFP2_TX_N: J4.19 U13.C3
SFP2_TX_P: J4.18 U13.C4
SFP3_DIS: J5.3 R108.2 R112.2 U13.U28
SFP3_LOSS: J5.8 R107.2 U13.U27
SFP3_RX_N: J5.13 U13.B5
SFP3_RX_P: J5.12 U13.B6
SFP3_TX_N: J5.19 U13.B1
SFP3_TX_P: J5.18 U13.B2
SFP4_DIS: J6.3 R115.2 R119.2 U13.U25
SFP4_LOSS: J6.8 R114.2 U13.T25
SFP4_RX_N: J6.13 U13.A7
SFP4_RX_P: J6.12 U13.A8
SFP4_TX_N: J6.19 U13.A3
SFP4_TX_P: J6.18 U13.A4
UART_RX: U13.AK26 U16.26
UART_TX: U13.AJ26 U16.25
VADJ: C37.2 C38.2 L5.2 R37.2 R38.2 U7.14(VOS)
N00970: J8.1 T1.3
N01015: J8.2(CATHODE) J9.2(CATHODE) SW1.2 SW1.5
N01089: F1.1 SW1.3 SW1.6
N383655: R122.1 U13.AB1 U18.3
N422635: D4.3 R59.2 U13.H10
N422637: D5.3 R60.2 U13.G10
N422639: D6.3 R61.2 U13.F10
N422641: D7.3 R62.2 U13.E10
N492190: C149.1 G1.6(VDD) L9.1 R75.1
N492322: C153.2 G1.4
N492394: C152.2 G1.5
N524744: G1.1 R75.2
N572784: R54.1 U13.K10
N672410: R52.2 U13.B10
N681399: R96.1 U13.W8
N699859: R84.1 R85.2 SW2.1
N700145: R86.1 R87.2 SW3.1
N719899: C155.1 C156.1 R88.1 U16.6(VDD)
N719999: R88.2 U16.9
N720121: J2.1(VCC) U16.7 U16.8
